# Altium PCB 400503.PcbDoc (part 1 of 3)
Units mm, origin at the board's own origin, x right, y up, seen from the top; angles counter-clockwise.
Board outline 200 x 200 mm, 4 copper layers (Top Layer, Mid-Layer 1, Mid-Layer 2, Bottom Layer), stack 1.58 mm thick; 173 components, 73 nets, 535 pads, 1026 vias.
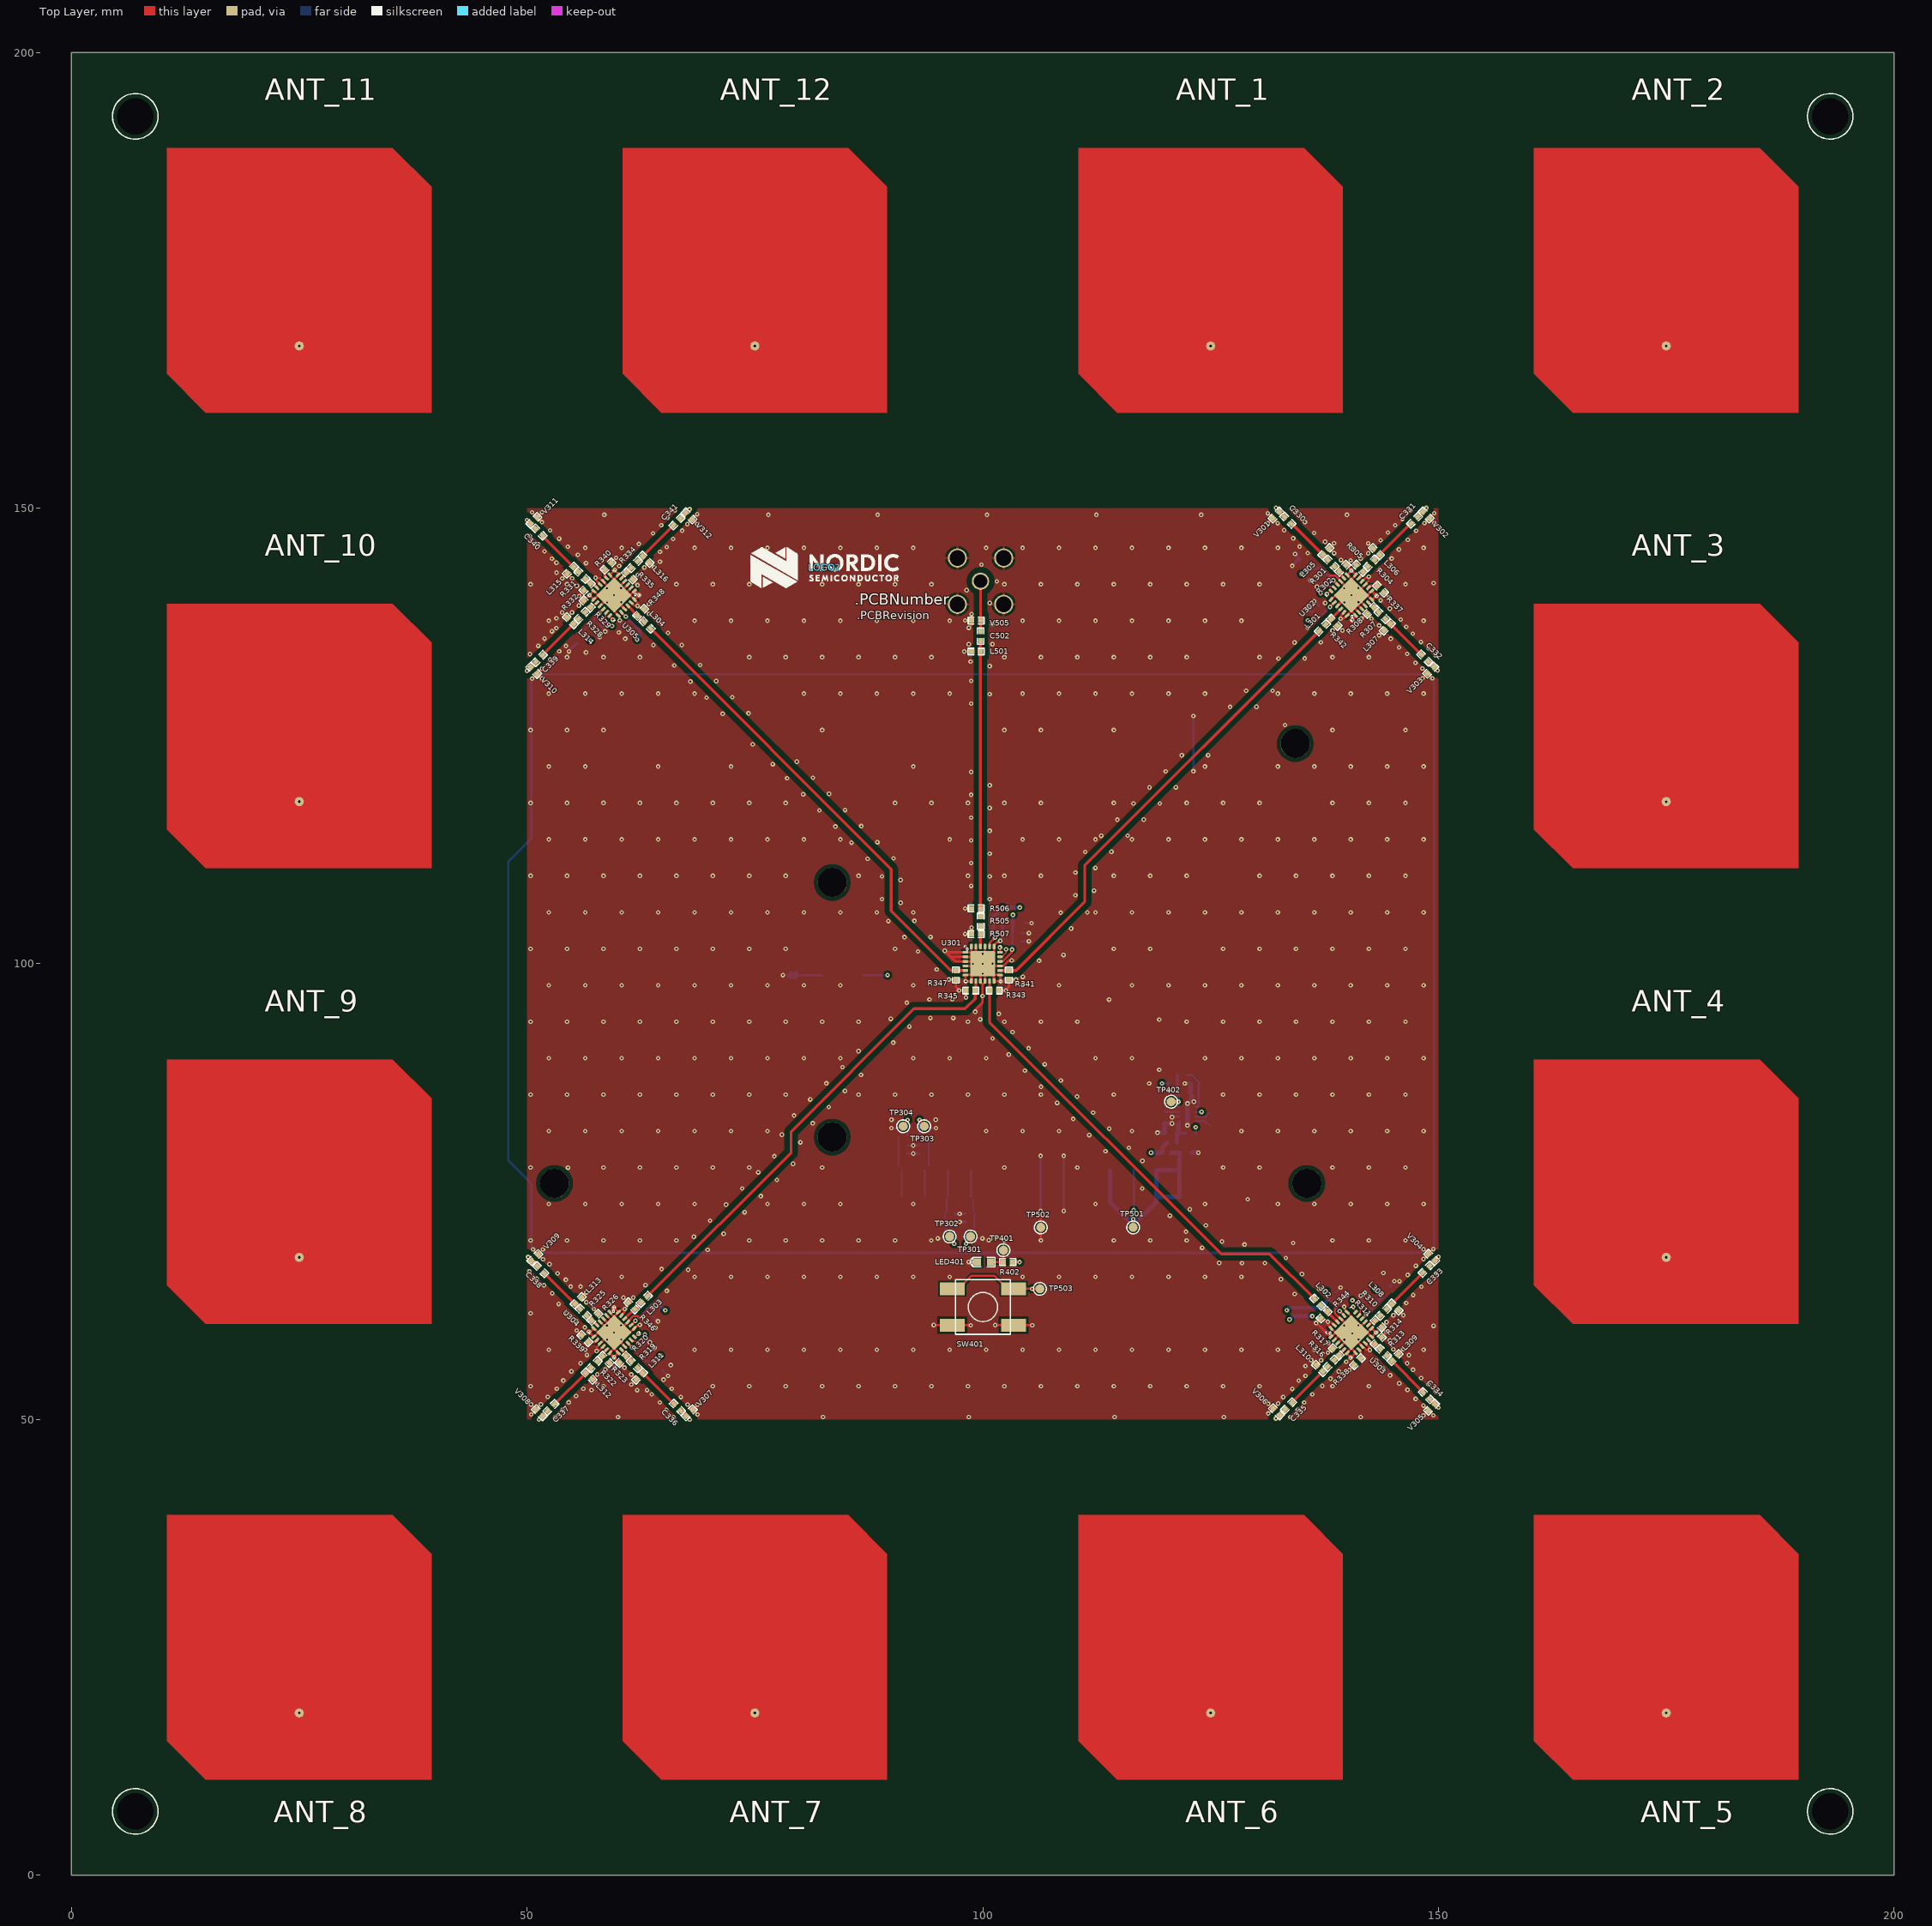
[diagram p0: Top Layer view]
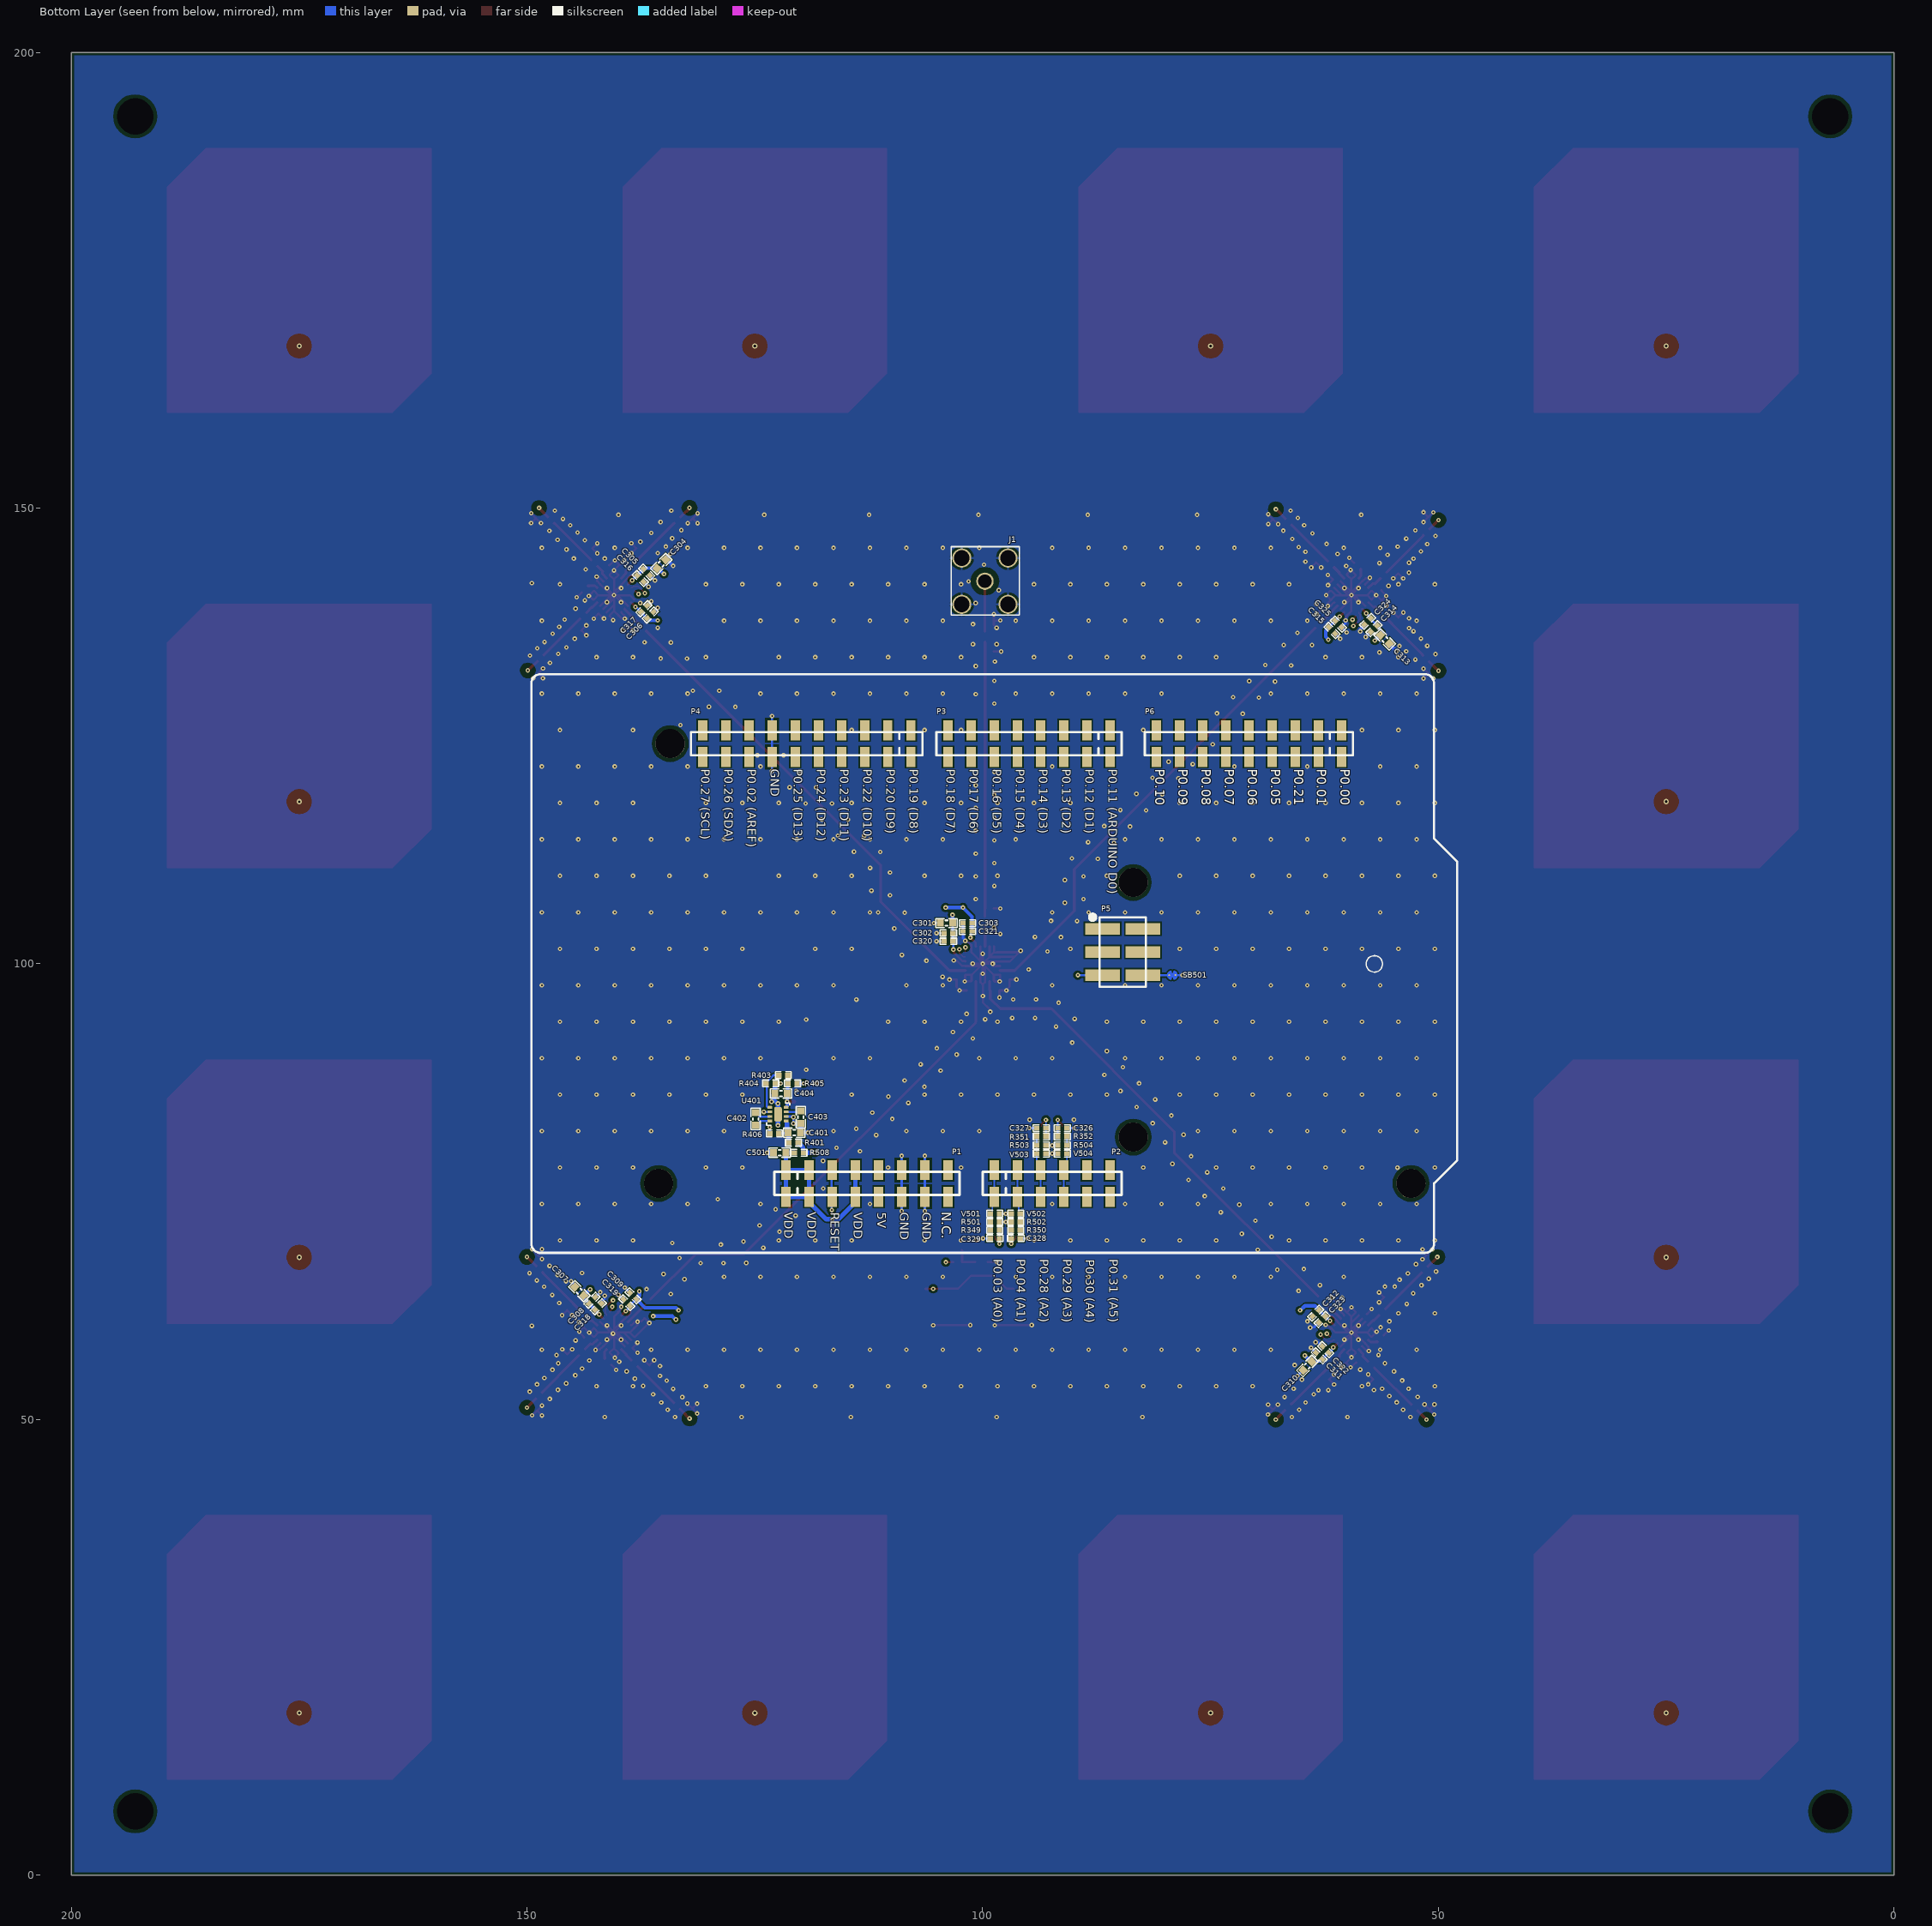
[diagram p1: Bottom Layer view, seen from below]
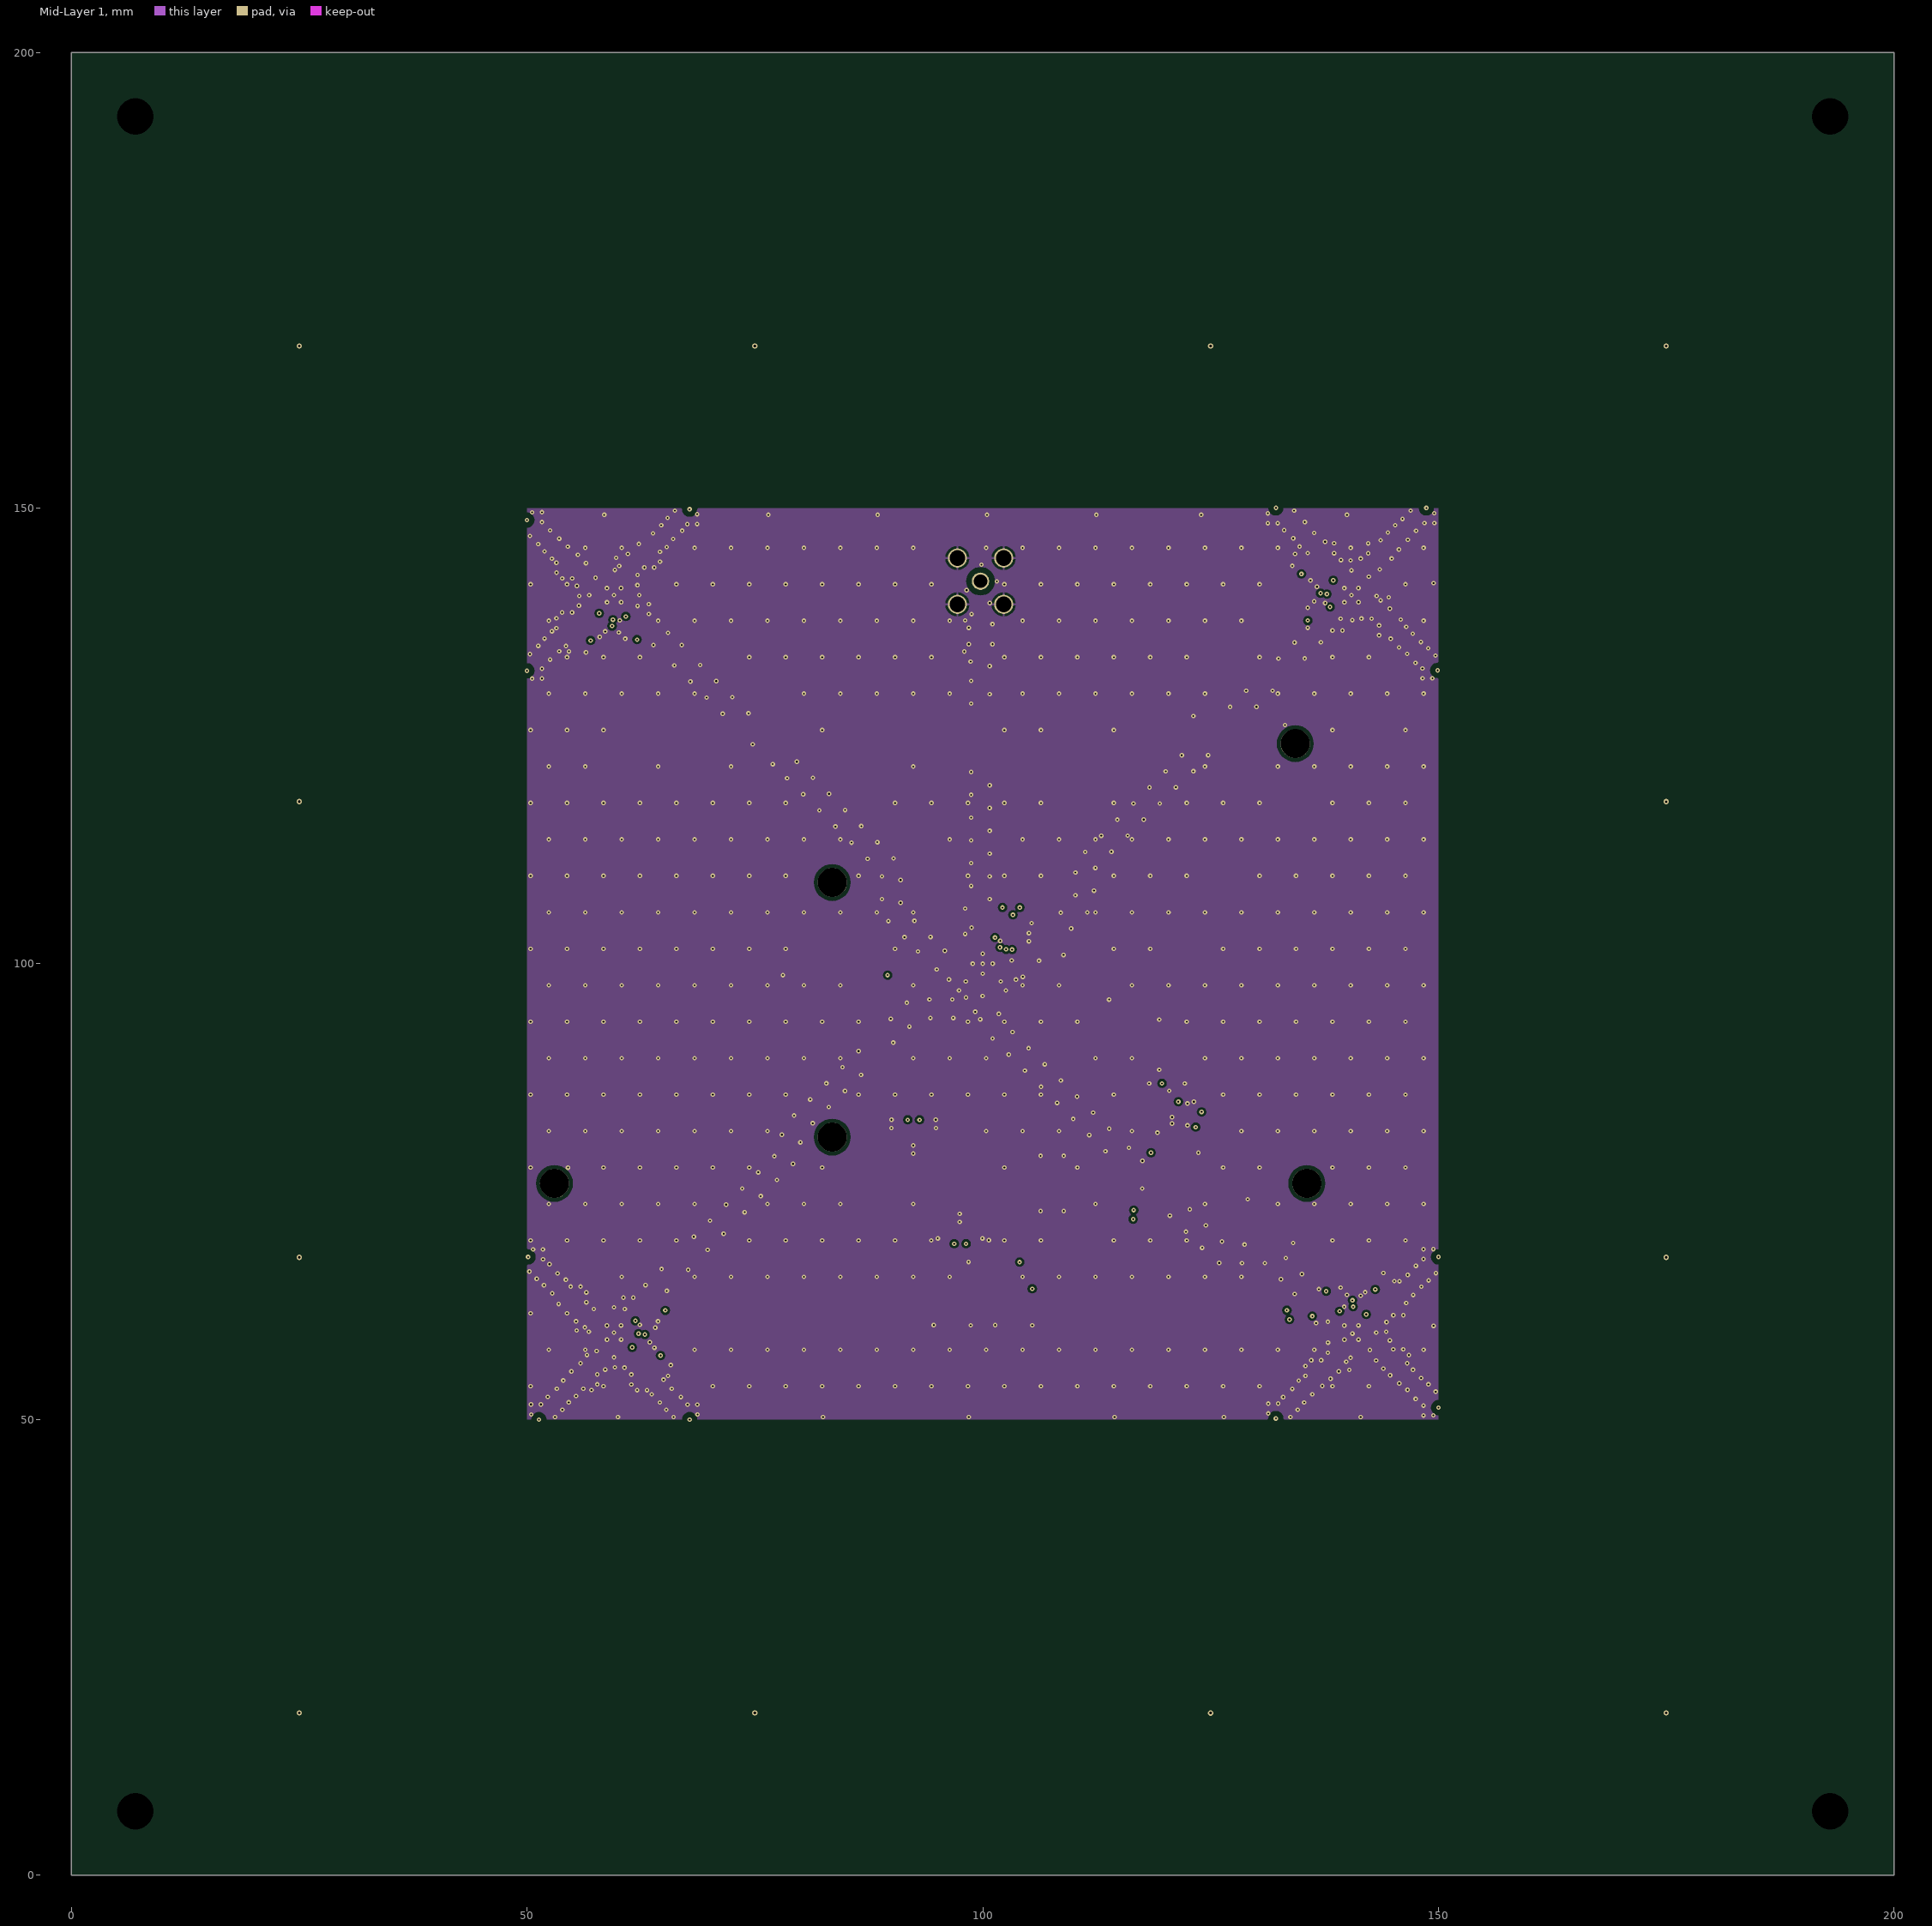
[diagram p2: Mid-Layer 1]
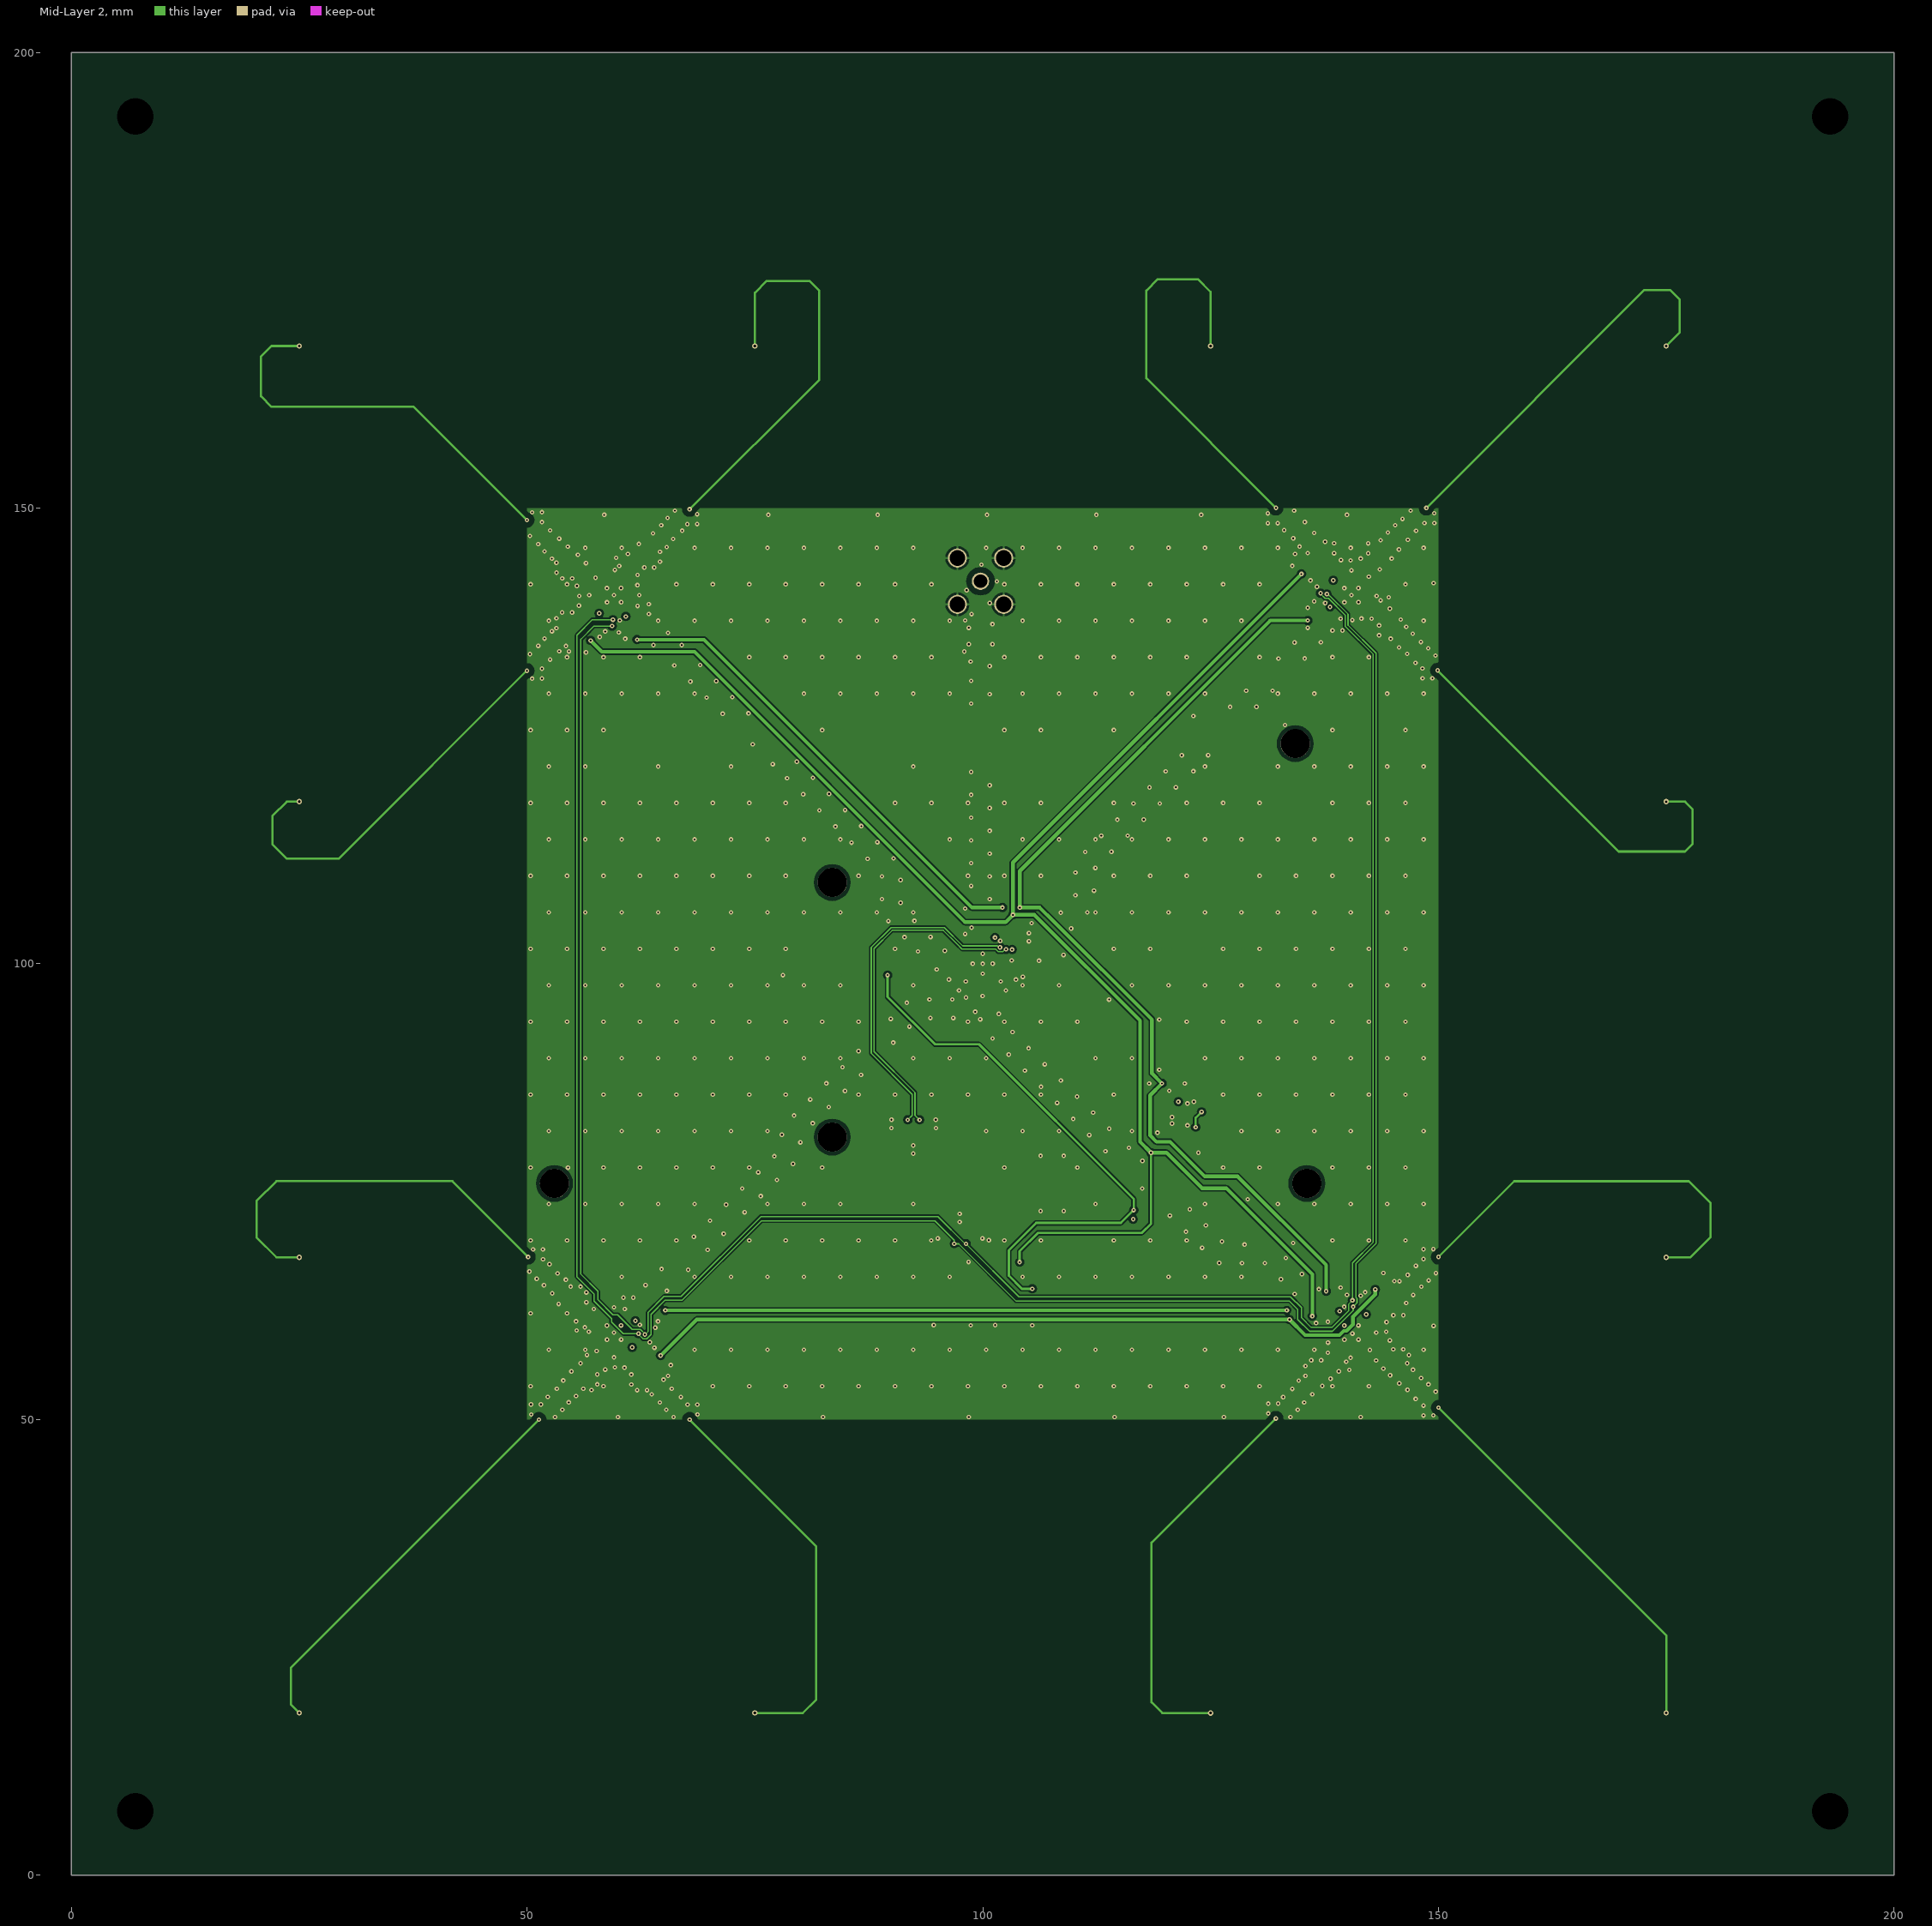
[diagram p3: Mid-Layer 2]
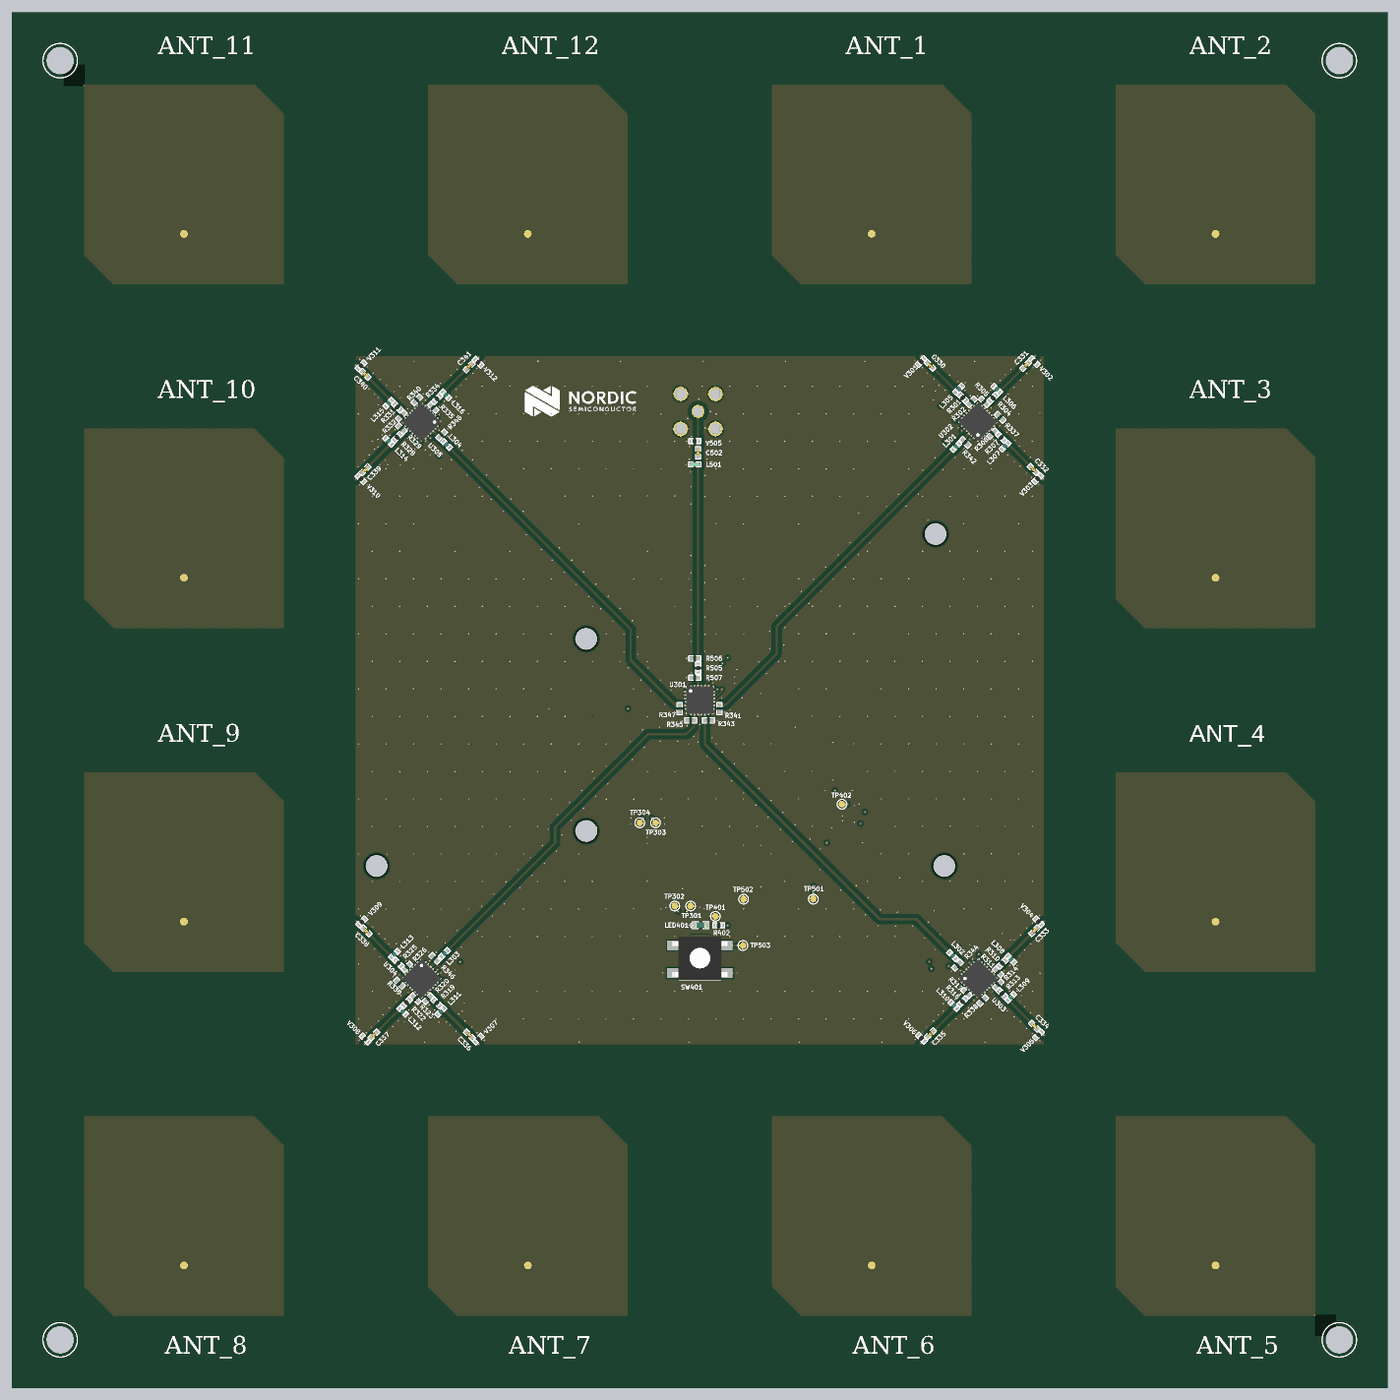
[diagram p6: 3D render of the assembled board from above, using the file's embedded part models]
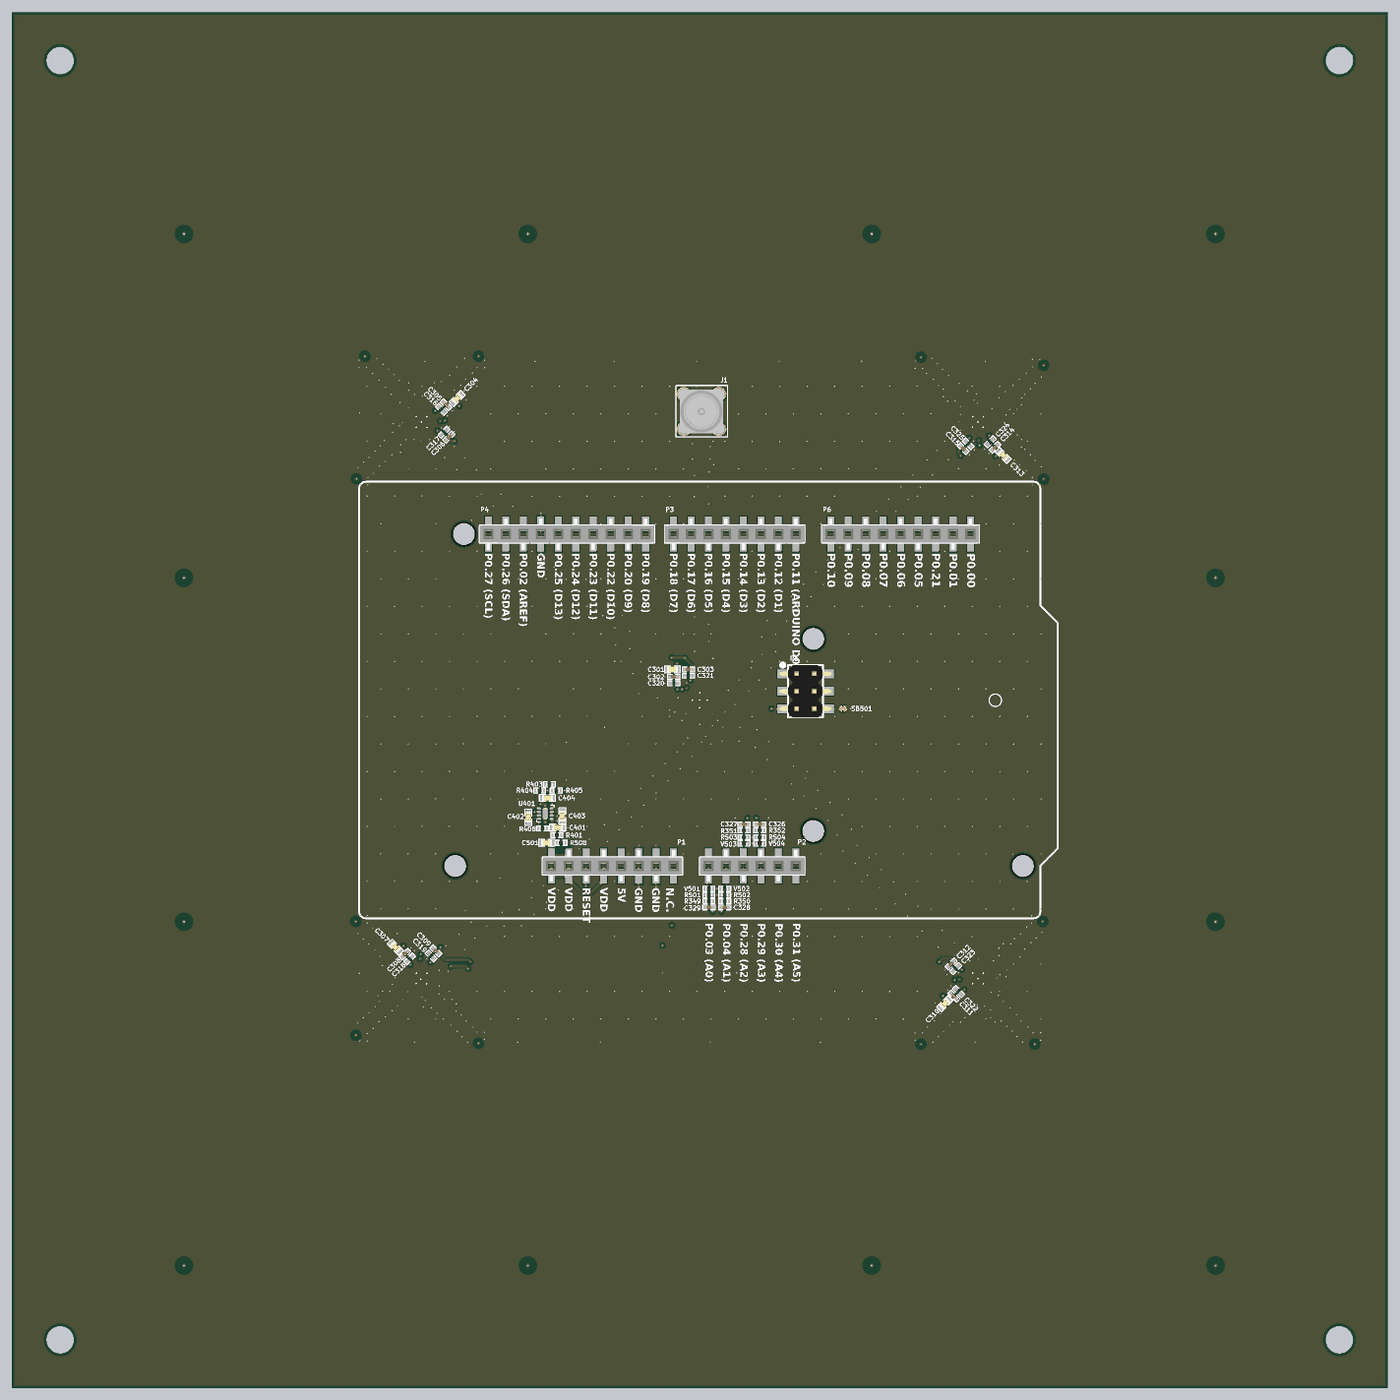
[diagram p7: 3D render of the assembled board from below, using the file's embedded part models]

## Layer stack, top to bottom
Top Solder: solder mask 0.02, Solder Resist, Dk 3.5
Top Layer: signal copper 0.035
Dielectric1: prepreg 0.18, FR-4, Dk 4.1
Mid-Layer 1: signal copper 0.035
Dielectric2: core 1.08, FR-4, Dk 4.3
Mid-Layer 2: signal copper 0.035
Dielectric3: prepreg 0.18, FR-4, Dk 4.1
Bottom Layer: signal copper 0.035
Bottom Solder: solder mask 0.02, Solder Resist, Dk 3.5

## Board outline
0,0 0,200 200,200 200,0

## Design rules (kind name [scope] priority, off if disabled: settings)
BoardOutlineClearance [All] p1: gap=0.3 ignorepadtopadclearanceinfootprint=FALSE
Clearance USB_Poly_Clearance [(InNamedPolygon('Top_Layer-GND')) vs (OnLayer('Mechanical 3'))] p1: gap=0.254 ignorepadtopadclearanceinfootprint=FALSE except(0: Arc-Hole Track-Hole SMDPad-Hole THPad-Hole Via-Hole Fill-Hole Poly-Hole Region-Hole Text-Hole)
Clearance USB_Clearance [(InDifferentialPairClass('All Differential Pairs'))] p2: gap=0.152 ignorepadtopadclearanceinfootprint=FALSE except(0: Arc-Hole Track-Hole SMDPad-Hole THPad-Hole Via-Hole Fill-Hole Poly-Hole Region-Hole Text-Hole)
Clearance ANT_Clerance [InNetClass('ANT_50ohm')] p3: gap=0.15 ignorepadtopadclearanceinfootprint=FALSE except(0.6: Track-Poly SMDPad-Poly THPad-Poly Via-Poly)
Clearance Polygon_Clearance [(InNamedPolygon('Top_Layer-GND')) or (InNamedPolygon('Bottom_Layer-GND')) or (InNamedPolygon('Mid_Layer_1-GND')) or (InNamedPolygon('Mid_Layer_2-VDD'))] p4: gap=0.25 ignorepadtopadclearanceinfootprint=FALSE
Clearance SB_Clearance [HasFootprint('Solderbridge') or HasFootprint('QFN40P180X140X55-10N')] p5: gap=0.127 ignorepadtopadclearanceinfootprint=FALSE except(0: Arc-Hole Track-Hole SMDPad-Hole THPad-Hole Via-Hole Fill-Hole Poly-Hole Region-Hole Text-Hole)
Clearance CSP_Clearance [HasFootprint('BGA4C40P2X2_76X76X62')] p6: gap=0.127 ignorepadtopadclearanceinfootprint=FALSE except(0: Arc-Hole Track-Hole SMDPad-Hole THPad-Hole Via-Hole Fill-Hole Poly-Hole Region-Hole Text-Hole)
Clearance P23_Clearance [HasFootprint('FPC_05P-0.5mm-RA-SMD')] p7: gap=0.127 ignorepadtopadclearanceinfootprint=FALSE except(0: Arc-Hole Track-Hole SMDPad-Hole THPad-Hole Via-Hole Fill-Hole Poly-Hole Region-Hole Text-Hole)
Clearance [All] p8: gap=0.15 ignorepadtopadclearanceinfootprint=FALSE except(0.4: Poly-Hole)
ComponentClearance [All] p1 off: gap=0.2 collisioncheckmode=3 verticalgap=0.2 showdistances=TRUE
DiffPairsRouting [All] p1: maxlimit=0.254 minlimit=0.15 mostfreqgap=0.254 toplayer_maxgap=0.15 toplayer_prefgap=0.15 toplayer_minwidth=0.203 toplayer_maxwidth=0.381 toplayer_prefwidth=0.381 midlayer1_mingap=0.254 midlayer1_minwidth=0.203 midlayer1_maxwidth=0.381 midlayer1_prefwidth=0.381 midlayer2_mingap=0.254 midlayer2_minwidth=0.203 midlayer2_maxwidth=0.381 midlayer2_prefwidth=0.381 bottomlayer_maxgap=0.15 bottomlayer_prefgap=0.15 bottomlayer_minwidth=0.203 bottomlayer_maxwidth=0.381 bottomlayer_prefwidth=0.381 maxuncoupledlength=12.7
FabricationTestPointUsage TestPointUsage [All] p1: valid=0 allowmultiple=FALSE
FabricationTestpoint Testpoint [All] p1: side=3 testpointundercomponent=TRUE minsize=1.016 maxsize=2.54 preferedsize=1.524 minholesize=0 maxholesize=1.016 preferedholesize=0.813 testpointgrid=0.025 allowsidetop=TRUE allowsidebottom=TRUE usegrid=TRUE gridtolerance=0
Height [All] p1 off: minheight=0 maxheight=25.4 prefheight=12.7
HoleSize [All] p1: absolutevalues=TRUE maxlimit=5 minlimit=0.2 maxpercent=80.000 minpercent=20.000
MinimumAnnularRing [All] p1 off: minimumring=0.152
PolygonConnect PolygonConnect_1 [isVia and innet(gnd) or isVia and innet('VDD') or HasFootprint('COAXIAL-SWF') or isVia and innet('VDD_SAM')] p1: connectstyle=Direct reliefconductorwidth=0.254 reliefentries=4 polygonreliefangle="90 Angle" airgapwidth=0.254
PolygonConnect [All] p2: thpad.connectstyle=Relief thpad.reliefconductorwidth=0.25 thpad.reliefentries=4 thpad.polygonreliefangle="90 Angle" thpad.airgapwidth=0.25 smdpad.connectstyle=NoConnect smdpad.reliefconductorwidth=0.254 smdpad.reliefentries=4 smdpad.polygonreliefangle="90 Angle" smdpad.airgapwidth=0.25 via.connectstyle=Direct via.reliefconductorwidth=0.254 via.reliefentries=4 via.polygonreliefangle="90 Angle" via.airgapwidth=0.254
RoomDefinition pca20054_sheet1_cover [InComponentClass('pca20054_sheet1_cover')] p1 off: confinementstyle=ConfineIn formatcopy=TRUE lockcomponents=FALSE outline -97.618,-106.345 -46.818,-106.345 -46.818,-80.945 -97.618,-80.945
RoomDefinition pca20054_sheet4_power_control [InComponentClass('pca20054_sheet4_power_control')] p2 off: confinementstyle=ConfineIn formatcopy=TRUE lockcomponents=FALSE outline -97.618,-106.345 -46.818,-106.345 -46.818,-80.945 -97.618,-80.945
RoomDefinition pca20054_sheet3_antenna_switches [InComponentClass('pca20054_sheet3_antenna_switches')] p3 off: confinementstyle=ConfineIn formatcopy=TRUE lockcomponents=FALSE outline -97.618,-106.345 -46.818,-106.345 -46.818,-80.945 -97.618,-80.945
RoomDefinition pca20054_sheet5_connectors [InComponentClass('pca20054_sheet5_connectors')] p4 off: confinementstyle=ConfineIn formatcopy=TRUE lockcomponents=FALSE outline -26.43,201.178 238.97,201.178 238.97,-19.422 -26.43,-19.422
RoutingVias [All] p1: holewidth=0.2 width=0.5 viastyle="Through Hole" minholewidth=0.2 minwidth=0.5 maxholewidth=0.2 maxwidth=0.5
SilkToSolderMaskClearance SilkscreenOverComponentPads [IsPad] p1: minsilkscreentomaskgap=0.254 clearancetoexposedcopper=TRUE
SolderMaskExpansion [All] p1: expansion=0.05 istentingtop=FALSE
Width Antenna [InNetClass('ANT_50ohm')] p1: maxlimit=3 minlimit=0.1 preferedwidth=0.315 midlayer1_prefwidth=0.24 midlayer2_prefwidth=0.24 minimp=50.000000 maximp=50.000000 favimp=50.000000
Width Pow [InNetClass('Pow_GND')] p2: maxlimit=3 minlimit=0.1 preferedwidth=0.25
Width Standard [All] p3: maxlimit=3 minlimit=0.1 preferedwidth=0.15
23 further rules are at their usual default settings.

## Classes and differential pairs
component class pca20054_sheet1_cover: LOGO?
net class Pow_GND: 3V3RF 3V3RFN GND
net class ANT_50ohm: ANT ANT_1_3 ANT_4_6 ANT_7_9 ANT_10_12 NetANT_1_1 NetANT_2_1 NetANT_3_1 NetANT_4_1 NetANT_5_1 NetANT_6_1 NetANT_7_1 NetANT_8_1 NetANT_9_1 NetANT_10_1 NetANT_11_1 NetANT_12_1 NetC330_1 NetC331_1 NetC332_1 NetC333_1 NetC334_1 NetC335_1 NetC336_1 NetC337_1 NetC338_1 NetC339_1 NetC340_1 NetC341_1 NetC502_1 NetC502_2 NetL301_2 NetL302_2 NetL303_2 NetL304_2 NetR301_1 NetR304_1 NetR307_1 NetR310_1 NetR313_1 NetR316_1 NetR319_1 NetR322_1 NetR325_1 NetR328_1 NetR331_1 NetR334_1
component class pca20054_sheet5_connectors: C501 C502 J1 L501 P1 P2 P3 P4 P5 P6 R501 R502 R503 R504 R505 R506 R507 R508 SB501 TP501 TP502 TP503 V501 V502 V503 V504 V505
component class pca20054_sheet4_power_control: C401 C402 C403 C404 LED401 R401 R402 R403 R404 R405 R406 SW401 TP401 TP402 U401
component class pca20054_sheet3_antenna_switches: ANT_1 ANT_2 ANT_3 ANT_4 ANT_5 ANT_6 ANT_7 ANT_8 ANT_9 ANT_10 ANT_11 ANT_12 C301 C302 C303 C304 C305 C306 C307 C308 C309 C310 C311 C312 C313 C314 C315 C316 C317 C318 C319 C320 C321 C322 C323 C324 C325 C326 C327 C328 C329 C330 C331 C332 C333 C334 C335 C336 C337 C338 C339 C340 C341 L301 L302 L303 L304 L305 L306 L307 L308 L309 L310 L311 L312 L313 L314 L315 L316 R301 R302 R304 R305 R307 R308 R310 R311 R313 R314 R316 R317 R319 R320 R322 R323 R325 R326 R328 R329 R331 R332 R334 R335 R337 R338 R339 R340 R341 R342 R343 R344 R345 R346 R347 R348 R349 R350 R351 R352 TP301 TP302 TP303 TP304 U301 U302 U303 U304 U305 V301 V302 V303 V304 V305 V306 V307 V308 V309 V310 V311 V312

## Components (designator, comment, footprint, x,y, rotation, side; value= is the part's Value field where it differs from the comment)
ANT_1 "Ø1.0mm,SMD" TP_SMD_Ø1.0mm 125,167.8 r0 top
ANT_2 "Ø1.0mm,SMD" TP_SMD_Ø1.0mm 175,167.8 r90 top
ANT_3 "Ø1.0mm,SMD" TP_SMD_Ø1.0mm 175,117.8 r90 top
ANT_4 "Ø1.0mm,SMD" TP_SMD_Ø1.0mm 175,67.799 r180 top
ANT_5 "Ø1.0mm,SMD" TP_SMD_Ø1.0mm 175,17.8 r90 top
ANT_6 "Ø1.0mm,SMD" TP_SMD_Ø1.0mm 125,17.799 r90 top
ANT_7 "Ø1.0mm,SMD" TP_SMD_Ø1.0mm 75,17.8 r90 top
ANT_8 "Ø1.0mm,SMD" TP_SMD_Ø1.0mm 25,17.8 r90 top
ANT_9 "Ø1.0mm,SMD" TP_SMD_Ø1.0mm 25,67.8 r90 top
ANT_10 "Ø1.0mm,SMD" TP_SMD_Ø1.0mm 25,117.8 r90 top
ANT_11 "Ø1.0mm,SMD" TP_SMD_Ø1.0mm 25,167.8 r90 top
ANT_12 "Ø1.0mm,SMD" TP_SMD_Ø1.0mm 75,167.8 r90 top
C301 "1.0µF" CAPC1608X06L 103.97,104.478 r180 bottom
C302 "100pF" CAPC1005X04L 103.77,103.378 r180 bottom
C303 "100pF" CAPC1005X04L 101.67,104.478 r180 bottom
C304 "1.0µF" CAPC1608X06L 135.27,143.878 r315 bottom
C305 "100pF" CAPC1005X04L 136.87,142.978 r45 bottom
C306 "100pF" CAPC1005X04L 136.47,138.278 r315 bottom
C307 "1.0µF" CAPC1608X06L 144.27,64.078 r225 bottom
C308 "100pF" CAPC1005X04L 142.87,63.078 r315 bottom
C309 "100pF" CAPC1005X04L 138.37,63.578 r225 bottom
C310 "1.0µF" CAPC1608X06L 64.37,55.878 r135 bottom
C311 "100pF" CAPC1005X04L 63.07,56.978 r225 bottom
C312 "100pF" CAPC1005X04L 63.47,61.664 r135 bottom
C313 "1.0µF" CAPC1608X06L 55.87,135.595 r45 bottom
C314 "100pF" CAPC1005X04L 57.07,136.778 r135 bottom
C315 "100pF" CAPC1005X04L 61.67,136.578 r45 bottom
C316 "N.C." CAPC1005X04L_NC 137.57,142.278 r45 bottom
C317 "N.C." CAPC1005X04L_NC 137.17,138.978 r315 bottom
C318 "N.C." CAPC1005X04L_NC 142.17,62.378 r315 bottom
C319 "N.C." CAPC1005X04L_NC 139.078,62.83 r225 bottom
C320 "N.C." CAPC1005X04L_NC 103.77,102.478 r180 bottom
C321 "N.C." CAPC1005X04L_NC 101.67,103.578 r180 bottom
C322 "N.C." CAPC1005X04L_NC 62.37,57.678 r225 bottom
C323 "N.C." CAPC1005X04L_NC 62.77,60.978 r135 bottom
C324 "N.C." CAPC1005X04L_NC 57.77,137.578 r135 bottom
C325 "N.C." CAPC1005X04L_NC 60.97,137.278 r45 bottom
C326 "18pF" CAPC1005X04L 91.27,81.978 r0 bottom
C327 "18pF" CAPC1005X04L 93.57,81.978 r180 bottom
C328 "18pF" CAPC1005X04L 96.37,69.878 r0 bottom
C329 "18pF" CAPC1005X04L 98.67,69.878 r180 bottom
C330 "10nF" CAPC1005X04L 133.49,148.685 r135 top
C331 "10nF" CAPC1005X04L 147.381,148.685 r45 top
C332 "10nF" CAPC1005X04L 148.507,133.558 r315 top
C333 "10nF" CAPC1005X04L 148.66,66.493 r45 top
C334 "10nF" CAPC1005X04L 148.685,52.619 r315 top
C335 "10nF" CAPC1005X04L 133.558,51.493 r225 top
C336 "10nF" CAPC1005X04L 66.493,51.34 r315 top
C337 "10nF" CAPC1005X04L 52.619,51.315 r225 top
C338 "10nF" CAPC1005X04L 51.493,66.442 r135 top
C339 "10nF" CAPC1005X04L 51.34,133.507 r225 top
C340 "10nF" CAPC1005X04L 51.315,147.381 r135 top
C341 "10nF" CAPC1005X04L 66.442,148.507 r45 top
C401 "4.7µF" CAPC1608X06L 120.67,81.478 r0 bottom
C402 "1.0µF" CAPC1608X06L 124.92,82.978 r270 bottom
C403 "4.7µF" CAPC1608X06L 119.97,83.178 r90 bottom
C404 "2.2µF" CAPC1608X06L 122.14,85.778 r180 bottom
C501 "1.0µF" CAPC1608X06L 122.27,79.278 r180 bottom
C502 "10nF" CAPC1005X04L 99.77,135.978 r90 top
J1 "SMA Vertical" CON_SMA_COAX_FEM_STRAIGHT_5P_1 99.76,141.99 r180 bottom
L301 "0.5nH" INDC1005X04L 137.27,136.878 r45 top
L302 "0.5nH" INDC1005X04L 136.77,62.878 r315 top
L303 "0.5nH" INDC1005X04L 62.87,63.178 r225 top
L304 "0.5nH" INDC1005X04L 63.17,137.178 r135 top
L305 "2.4nH" INDC1005X04L 137.663,145.25 r225 top
L306 "2.4nH" INDC1005X04L 143.194,145.243 r315 top
L307 "2.4nH" INDC1005X04L 144.394,136.946 r45 top
L308 "2.4nH" INDC1005X04L 145.25,62.337 r135 top
L309 "2.4nH" INDC1005X04L 145.243,56.806 r225 top
L310 "2.4nH" INDC1005X04L 136.946,55.606 r315 top
L311 "2.4nH" INDC1005X04L 62.337,54.75 r45 top
L312 "2.4nH" INDC1005X04L 56.806,54.757 r135 top
L313 "2.4nH" INDC1005X04L 55.606,63.054 r225 top
L314 "2.4nH" INDC1005X04L 54.75,137.663 r315 top
L315 "2.4nH" INDC1005X04L 54.757,143.194 r45 top
L316 "2.4nH" INDC1005X04L 63.054,144.394 r135 top
L501 "30nH" INDC1005X04L_WW 99.27,134.278 r0 top
LED401 "L0603G" LED_0603_G 100.151,67.286 r0 top
LOGO? "Nordic Logo" NORDIC_LOGO_LYING 82.67,143.478 r0 top
P1 "Socket 1x8" SOCKET_1x8_SMD 121.59,75.905 r180 bottom locked
P2 "Socket 1x6" SOCKET_1x6_SMD 98.73,75.905 r180 bottom locked
P3 "Socket 1x8" SOCKET_1x8_SMD 86.03,124.165 r0 bottom locked
P4 "Socket 1x10" SOCKET_1x10_SMD 107.874,124.165 r0 bottom locked
P5 "Pin Hdr 2x3" HDR_2x3-SMD 84.633,101.305 r270 bottom locked
P6 "Socket 1x9" SOCKET_1x9_SMD 60.63,124.165 r0 bottom locked
R301 "0R" RESC1005X04L#1 138.229,143.978 r135 top
R302 "N.C." RESC1005X04L_NC 139.501,143.412 r225 top
R304 "0R" RESC1005X04L#1 142.629,143.971 r45 top
R305 "N.C." RESC1005X04L_NC 141.356,143.405 r315 top
R307 "0R" RESC1005X04L#1 143.829,138.219 r315 top
R308 "N.C." RESC1005X04L_NC 142.563,138.777 r45 top
R310 "0R" RESC1005X04L#1 143.978,61.771 r45 top locked
R311 "N.C." RESC1005X04L_NC 143.412,60.499 r135 top locked
R313 "0R" RESC1005X04L#1 143.971,57.371 r315 top locked
R314 "N.C." RESC1005X04L_NC 143.405,58.644 r225 top locked
R316 "0R" RESC1005X04L#1 138.219,56.171 r225 top locked
R317 "N.C." RESC1005X04L_NC 138.777,57.437 r315 top locked
R319 "0R" RESC1005X04L#1 61.771,56.022 r315 top locked
R320 "N.C." RESC1005X04L_NC 60.499,56.588 r45 top locked
R322 "0R" RESC1005X04L#1 57.371,56.029 r225 top locked
R323 "N.C." RESC1005X04L_NC 58.644,56.595 r135 top locked
R325 "0R" RESC1005X04L#1 56.171,61.781 r135 top locked
R326 "N.C." RESC1005X04L_NC 57.437,61.223 r225 top locked
R328 "0R" RESC1005X04L#1 56.022,138.229 r225 top locked
R329 "N.C." RESC1005X04L_NC 56.588,139.501 r315 top locked
R331 "0R" RESC1005X04L#1 56.029,142.629 r135 top locked
R332 "N.C." RESC1005X04L_NC 56.595,141.356 r45 top locked
R334 "0R" RESC1005X04L#1 61.781,143.829 r45 top locked
R335 "N.C." RESC1005X04L_NC 61.223,142.563 r135 top locked
R337 "N.C." RESC1005X04L_NC 143.654,141.12 r315 top
R338 "N.C." RESC1005X04L_NC 141.12,56.346 r225 top locked
R339 "N.C." RESC1005X04L_NC 56.346,58.88 r135 top locked
R340 "N.C." RESC1005X04L_NC 58.88,143.654 r45 top locked
R341 "N.C." RESC1005X04L_NC 102.87,98.778 r90 top
R342 "N.C." RESC1005X04L_NC 138.57,137.478 r135 top
R343 "N.C." RESC1005X04L_NC 101.27,97.078 r180 top
R344 "N.C." RESC1005X04L_NC 137.47,61.478 r45 top
R345 "N.C." RESC1005X04L_NC 98.67,97.078 r0 top
R346 "N.C." RESC1005X04L_NC 61.47,62.478 r315 top
R347 "N.C." RESC1005X04L_NC 97.07,98.778 r90 top
R348 "N.C." RESC1005X04L_NC 62.47,138.578 r225 top
R349 "100R" RESC1005X04L#1 98.67,70.778 r180 bottom
R350 "100R" RESC1005X04L#1 96.37,70.778 r0 bottom
R351 "100R" RESC1005X04L#1 93.57,81.078 r180 bottom
R352 "100R" RESC1005X04L#1 91.27,81.078 r0 bottom
R401 "0R" RESC1005X04L#1 120.77,80.378 r0 bottom
R402 "220R" RESC1005X04L#1 102.751,67.263 r0 top
R403 "86k6" RESC1005X04L#1 121.87,87.778 r180 bottom
R404 "51k1" RESC1005X04L#1 123.27,86.878 r0 bottom
R405 "0R" RESC1005X04L#1 120.87,86.878 r180 bottom
R406 "10k" RESC1005X04L#1 122.87,81.378 r0 bottom
R501 "1M0" RESC1005X04L#1 98.67,71.678 r0 bottom
R502 "1M0" RESC1005X04L#1 96.37,71.678 r180 bottom
R503 "1M0" RESC1005X04L#1 93.57,80.078 r0 bottom
R504 "1M0" RESC1005X04L#1 91.27,80.078 r180 bottom
R505 "0R" RESC1005X04L#1 99.77,104.678 r270 top
R506 "N.C." RESC1005X04L_NC 99.27,106.078 r0 top
R507 "N.C." RESC1005X04L_NC 99.27,103.278 r0 top
R508 "0R" RESC1005X04L#1 120.17,79.278 r180 bottom
SB501 "Solderbridge" Solderbridge_Shorted_Power 79.188,98.762 r180 bottom net-tie
SW401 "PB SW" Switch-PB-6.2x6.3mm-SMD 100.024,62.349 r0 top
TP301 "Ø1.0mm,SMD" TP_SMD_Ø1.0mm 98.67,70.078 r180 top
TP302 "Ø1.0mm,SMD" TP_SMD_Ø1.0mm 96.37,70.078 r180 top
TP303 "Ø1.0mm,SMD" TP_SMD_Ø1.0mm 93.57,82.178 r180 top
TP304 "Ø1.0mm,SMD" TP_SMD_Ø1.0mm 91.27,82.178 r180 top
TP401 "Ø1.0mm,SMD" TP_SMD_Ø1.0mm 102.27,68.578 r90 top
TP402 "Ø1.0mm,SMD" TP_SMD_Ø1.0mm 120.67,84.878 r90 top
TP501 "Ø1.0mm,SMD" TP_SMD_Ø1.0mm 116.51,71.078 r90 top
TP502 "Ø1.0mm,SMD" TP_SMD_Ø1.0mm 106.37,71.078 r90 top
TP503 "Ø1.0mm,SMD" TP_SMD_Ø1.0mm 106.27,64.343 r90 top
U301 "PE42442" QFN50P400X400X80_HS-25N 100,100.018 r0 top
U302 "PE42442" QFN50P400X400X80_HS-25N 140.454,140.454 r135 top
U303 "PE42442" QFN50P400X400X80_HS-25N 140.454,59.546 r45 top locked
U304 "PE42442" QFN50P400X400X80_HS-25N 59.546,59.546 r315 top locked
U305 "PE42442" QFN50P400X400X80_HS-25N 59.546,140.454 r225 top locked
U401 "LM27761" SON50P200X80_HS-9L 122.46,83.508 r0 bottom
V301 "LXES15AAA1-133" RESC1005X04L#2 132.183,149.246 r225 top
V302 "LXES15AAA1-133" RESC1005X04L#2 148.657,149.256 r315 top
V303 "LXES15AAA1-133" RESC1005X04L#2 149.15,132.226 r225 top
V304 "LXES15AAA1-133" RESC1005X04L#2 149.263,67.799 r135 top
V305 "LXES15AAA1-133" RESC1005X04L#2 149.256,51.343 r225 top
V306 "LXES15AAA1-133" RESC1005X04L#2 132.226,50.85 r135 top
V307 "LXES15AAA1-133" RESC1005X04L#2 67.8,50.737 r45 top
V308 "LXES15AAA1-133" RESC1005X04L#2 51.343,50.744 r135 top
V309 "LXES15AAA1-133" RESC1005X04L#2 50.85,67.774 r45 top
V310 "LXES15AAA1-133" RESC1005X04L#2 50.737,132.2 r315 top
V311 "LXES15AAA1-133" RESC1005X04L#2 50.744,148.657 r45 top
V312 "LXES15AAA1-133" RESC1005X04L#2 67.774,149.15 r315 top
V501 "LXES15AAA1-133" RESC1005X04L#2 98.67,72.578 r180 bottom
V502 "LXES15AAA1-133" RESC1005X04L#2 96.37,72.578 r0 bottom
V503 "LXES15AAA1-133" RESC1005X04L#2 93.57,79.178 r180 bottom
V504 "LXES15AAA1-133" RESC1005X04L#2 91.27,79.178 r0 bottom
V505 "LXES15AAA1-133" RESC1005X04L#2 99.27,137.678 r180 top

## Footprints (in the part's own frame and the unit in brackets; to place one, negate y for a bottom-side part, rotate by r counter-clockwise, add the part's x,y. Pads: shape width x height; smd on the part's side, far side on the other; paste and mask are expansions set on the pad)
CAPC1005X04L [mm]
  rect 0.6x0.5 smd: 1(-0.5,0) 2(0.5,0)
  silkscreen extent -0.9,-0.35 0.9,0.35, body extent -0.51,-0.25 0.51,0.25, height 0.5
CAPC1005X04L_NC [mm] "Chip Capacitor, 2-Leads, Body 1.0x0.5mm, IPC High Density"
  rect 0.6x0.5 smd: 1(-0.5,0) 2(0.5,0)
  silkscreen extent -0.9,-0.35 0.9,0.35
CAPC1608X06L [mm]
  rect 0.75x0.8 smd: 1(-0.675,0) 2(0.675,0)
  silkscreen extent -1.17,-0.5 1.17,0.5, body extent -0.8,-0.43 0.8,0.43, height 0.8
CON_SMA_COAX_FEM_STRAIGHT_5P_1 [mm]
  round 1.9 hole 1.5 paste-127 mask+0.05: 1(0,0)
  round 2.1 hole 1.7 paste-127 mask+0.05: 2(-2.54,-2.54) 3(2.54,-2.54) 4(2.54,2.54) 5(-2.54,2.54)
  body extent -3.22,-3.16 3.15,3.22, height 9.43
HDR_2x3-SMD [mil]
  rect 50x150 smd: 1(-100,-87.5) 2(-100,87.5) 3(0,-87.5) 4(0,87.5) 5(100,-87.5) 6(100,87.5)
  silkscreen extent -160,-140 150,100, body extent -150,-148 150,148, height 382
INDC1005X04L [mm]
  rect 0.65x0.5 smd: 1(-0.475,0) 2(0.475,0)
  silkscreen extent -0.9,-0.35 0.9,0.35, body extent -0.5,-0.3 0.5,0.3, height 0.5
INDC1005X04L_WW [mm] "Chip Inductor, 2-Leads, Body 1.0x0.5mm, IPC High Density"
  rect 0.65x0.5 smd: 1(-0.475,0) 2(0.475,0)
  silkscreen extent -0.9,-0.35 0.9,0.35, body extent -0.5,-0.3 0.5,0.3, height 0.51
LED_0603_G [mil]
  rect 30x32 smd: 1(-27.5,0) 2(27.5,0)
  silkscreen extent -58,-20 48,20, body extent -32,-16 32,16, height 24
NORDIC_LOGO_LYING [mm]
  silkscreen extent -8.13,-2.24 8.13,2.24
QFN50P400X400X80_HS-25N [mm] "PQFN, 24-Leads, Body 4.00x4.00mm, Pitch 0.50mm, Thermal Pad 2.75x2.75mm, IPC Medium Density"
  rrect50% 0.6x0.3 smd: 1(-1.9,1.25) 2(-1.9,0.75) 3(-1.9,0.25) 4(-1.9,-0.25) 5(-1.9,-0.75) 6(-1.9,-1.25) 13(1.9,-1.25) 14(1.9,-0.75) 15(1.9,-0.25) 16(1.9,0.25) 17(1.9,0.75) 18(1.9,1.25)
  rrect50% 0.3x0.6 smd: 7(-1.25,-1.9) 8(-0.75,-1.9) 9(-0.25,-1.9) 10(0.25,-1.9) 11(0.75,-1.9) 12(1.25,-1.9) 19(1.25,1.9) 20(0.75,1.9) 21(0.25,1.9) 22(-0.25,1.9) 23(-0.75,1.9) 24(-1.25,1.9)
  rrect10% 2.75x2.75 smd paste-5: 25(0,0)
  silkscreen extent -2,-2 2,2, body extent -2,-2 2,2, height 0.8
RESC1005X04L#1 [mm]
  rect 0.6x0.55 smd: 1(-0.5,0) 2(0.5,0)
  silkscreen extent -0.88,-0.38 0.88,0.38, body extent -0.5,-0.25 0.5,0.25, height 0.3
RESC1005X04L#2 [mm] "Chip Resistor, 2-Leads, Body 1.0x0.5mm, IPC High Density"
  rect 0.6x0.55 smd mask+0.05: 1(-0.5,0) 2(0.5,0)
  silkscreen extent -0.88,-0.38 0.88,0.38, body extent -0.5,-0.25 0.5,0.25, height 0.3
RESC1005X04L_NC [mm] "Chip Resistor, 2-Leads, Body 1.0x0.5mm, IPC High Density"
  rect 0.6x0.55 smd mask+0.05: 1(-0.5,0) 2(0.5,0)
  silkscreen extent -0.88,-0.38 0.88,0.38
SOCKET_1x6_SMD [mm]
  rect 1.02x2.19 smd: 1(0,-1.465) 1(0,1.465) 2(2.54,-1.465) 2(2.54,1.465) 3(5.08,-1.465) 3(5.08,1.465) 4(7.62,-1.465) 4(7.62,1.465) 5(10.16,-1.465) 5(10.16,1.465) 6(12.7,1.465) 6(12.7,-1.465)
  silkscreen extent -1.27,-1.27 13.97,1.27, body extent -1.27,-2.29 13.97,2.29, height 7.47
SOCKET_1x8_SMD [mm]
  rect 1.02x2.19 smd: 1(0,-1.465) 1(0,1.465) 2(2.54,-1.465) 2(2.54,1.465) 3(5.08,-1.465) 3(5.08,1.465) 4(7.62,-1.465) 4(7.62,1.465) 5(10.16,-1.465) 5(10.16,1.465) 6(12.7,1.465) 6(12.7,-1.465) 7(15.24,-1.465) 7(15.24,1.465) 8(17.78,-1.465) 8(17.78,1.465)
  silkscreen extent -1.27,-1.27 19.05,1.27, body extent -1.27,-2.29 19.05,2.29, height 7.47
SOCKET_1x9_SMD [mm]
  rect 1.02x2.19 smd: 1(0,-1.465) 1(0,1.465) 2(2.54,-1.465) 2(2.54,1.465) 3(5.08,-1.465) 3(5.08,1.465) 4(7.62,-1.465) 4(7.62,1.465) 5(10.16,-1.465) 5(10.16,1.465) 6(12.7,1.465) 6(12.7,-1.465) 7(15.24,-1.465) 7(15.24,1.465) 8(17.78,-1.465) 8(17.78,1.465) 9(20.32,-1.465) 9(20.32,1.465)
  silkscreen extent -1.27,-1.27 21.59,1.27, body extent -1.26,-2.3 21.6,2.28, height 7.47
SOCKET_1x10_SMD [mm]
  rect 1.02x2.19 smd: 1(0,-1.465) 1(0,1.465) 2(2.54,-1.465) 2(2.54,1.465) 3(5.08,-1.465) 3(5.08,1.465) 4(7.62,-1.465) 4(7.62,1.465) 5(10.16,-1.465) 5(10.16,1.465) 6(12.7,-1.465) 6(12.7,1.465) 7(15.24,-1.465) 7(15.24,1.465) 8(17.78,-1.465) 8(17.78,1.465) 9(20.32,-1.465) 9(20.32,1.465) 10(22.86,-1.465) 10(22.86,1.465)
  silkscreen extent -1.27,-1.27 24.13,1.27, body extent -1.27,-2.29 24.13,2.29, height 7.47
Solderbridge_Shorted_Power [mm]
  round 0.2 smd paste-10: 1(-0.338,0) 2(0.338,0)
  Top Layer region: 0.102,0.432 0.178,0.505 0.296,0.467 0.361,0.424 0.434,0.351 0.488,0.292 0.546,0.193 0.574,0.099 0.569,-0.122 0.544,-0.193 0.46,-0.33 0.376,-0.411 0.284,-0.469 0.183,-0.5 0.132,-0.483 0.102,-0.43
  Top Layer region: -0.102,-0.432 -0.178,-0.505 -0.296,-0.467 -0.361,-0.424 -0.434,-0.351 -0.488,-0.292 -0.546,-0.193 -0.574,-0.099 -0.569,0.122 -0.544,0.193 -0.46,0.33 -0.376,0.411 -0.284,0.469 -0.183,0.5 -0.132,0.483 -0.102,0.43
  Top Layer lines w0.152: 0.178,-0.431 ccw(c0.068,0) 0.178,0.431 ; -0.178,-0.431 cw(c-0.068,0) -0.178,0.431
  Top Layer lines w0.508: 0.338,0 -0.338,0
SON50P200X80_HS-9L [mm] "SON, 8-Leads, Body 2.00x2.00mm, Pitch 0.50mm, Thermal Pad 1.60x0.69mm, IPC High Density"
  rrect50% 0.55x0.3 smd: 1(-0.895,0.75) 2(-0.895,0.25) 3(-0.895,-0.25) 4(-0.895,-0.75) 5(0.895,-0.75) 6(0.895,-0.25) 7(0.895,0.25) 8(0.895,0.75)
  rrect50% 0.85x1.6 smd paste-0.05: 9(0,0)
  body extent -1.7,-1.05 1.05,1.05, height 1
Switch-PB-6.2x6.3mm-SMD [mm]
  rect 2.75x1.4 smd: 1(-3.375,2) 1(3.375,2) 2(-3.375,-2) 2(3.375,-2)
  silkscreen extent -3,-3 3,3, body extent -4,-3 4,3.3, height 3.1
TP_SMD_Ø1.0mm [mm]
  round 1 smd paste-5: 1(0,0)

## Part data
ANT_1 ANT_2 ANT_3 ANT_4 ANT_5 ANT_6 ANT_7 ANT_8 ANT_9 ANT_10 ANT_11 ANT_12 TP301 TP302 TP303 TP304 TP401 TP402 TP501 TP502 TP503: library part TP_SMD_Ø1.0MM, "1.0mm circular SMD testpad", Manufacturer="Nordic Semiconductor", Part number IPS=N.A., Artikkelnr Noca=N.A., ComponentLink1Description=Datasheet, ComponentLink2Description="Supplier link", Footprint Doc=TP_SMD_Ø1.0mm, LatestRevisionDate=2013-06-11, Part Number=TP_SMD_Ø1.0MM, Pin Count=1, Published=2013-06-11, Publisher="Nordic Semiconductor"
C301 C304 C307 C310 C313 C402 C501: library part C0603-1µ0, "Capacitor, X7R, ±10%", Part number IPS=00000000616, Artikkelnr Noca=20039282, ComponentLink1Description=Datasheet, ComponentLink2Description="Supplier link", Footprint Doc=0603, LatestRevisionDate=2013-06-05, Note=16V, Part Number=C0603-1µ0, Pin Count=2, Published=2009-05-08, Publisher="Nordic Semiconductor"
C302 C303 C305 C306 C308 C309 C311 C312 C314 C315: library part C0402-100p, "Capacitor, NP0, ±5%", Part number IPS=00000002361, Artikkelnr Noca=20029135, ComponentLink1Description=Datasheet, ComponentLink2Description="Supplier link", Footprint Doc=0402, LatestRevisionDate=2009-05-08, Note=50V, Part Number=C0402-100p, Pin Count=2, Published=2009-05-08, Publisher="Nordic Semiconductor"
C316 C317 C318 C319 C320 C321 C322 C323 C324 C325: library part C0402-N.C., "Not mounted", Part number IPS=N.A., Artikkelnr Noca=N.A., Assembly="Not mounted", ComponentLink1Description=Datasheet, ComponentLink2Description="Supplier link", Footprint Doc=0402, LatestRevisionDate=2009-05-08, Note="Chip Cap", Part Number=C0402-N.C., Pin Count=2, Published=2009-05-08, Publisher="Nordic Semiconductor"
C326 C327 C328 C329: library part C0402-18p, "Capacitor, NP0, ±5%", Part number IPS=N.A., Artikkelnr Noca=20029209, ComponentLink1Description=Datasheet, ComponentLink2Description="Supplier link", Footprint Doc=0402, LatestRevisionDate=2009-05-08, Note=50V, Part Number=C0402-18p, Pin Count=2, Published=2009-05-08, Publisher="Nordic Semiconductor"
C330 C331 C332 C333 C334 C335 C336 C337 C338 C339 C340 C341 C502: library part C0402-10n, "Capacitor, X7R, ±10%", Part number IPS=00000007784, Artikkelnr Noca=20039166, ComponentLink1Description=Datasheet, ComponentLink2Description="Supplier link", Footprint Doc=0402, LatestRevisionDate=2009-11-23, Note=16V, Part Number=C0402-10n, Pin Count=2, Published=2009-05-08, Publisher="Nordic Semiconductor"
C401 C403: library part C0603-4µ7, "Capacitor, X5R, ±10%", Part number IPS=00000007783, Artikkelnr Noca=20069060, ComponentLink1Description=Datasheet, ComponentLink2Description="Supplier link", Footprint Doc=0603, LatestRevisionDate=2009-11-23, Note=6.3V, Part Number=C0603-4µ7, Pin Count=2, Published=2009-05-08, Publisher="Nordic Semiconductor"
C404: library part C0603-2µ2, "Capacitor, X7R, ±10%", Part number IPS=N.A., Artikkelnr Noca=20039322, ComponentLink1Description=Datasheet, ComponentLink2Description="Supplier link", Footprint Doc=0603, LatestRevisionDate=2016-10-10, Note=6.3V, Part Number=C0603-2µ2, Pin Count=2, Published=2009-05-08, Publisher="Nordic Semiconductor"
J1: library part SMA-Vert-Std_Sigma, "SMA Vertical connector", Part number IPS=N.A., Artikkelnr Noca=N.A., ComponentLink1Description=Datasheet, ComponentLink2Description="Supplier link", Footprint Doc=SMA-VERT, LatestRevisionDate=2009-12-12, Note="SMA vertical", Part Number=SMA-Vert-Std_Sigma, Pin Count=5, Published=2009-12-12, Publisher="Nordic Semiconductor"
L301 L302 L303 L304: library part L0402-0n5, "Inductor, 1A, ±0.1nH", Manufacturer="TDK Corporation", Manufacturer Part Number=MLG1005S0N5BT000, Part number IPS=N.A., Supplier Part Number 1=445-16235-1-ND, Artikkelnr Noca=N.A., ComponentLink1Description=Datasheet, ComponentLink2Description="Supplier link", ComponentLink2URL=https://product.tdk.com/info/en/catalog/datasheets/inductor_commercial_high-frequency_mlg1005s_en.pdf?ref_disty=digikey, Footprint Doc=0402, LatestRevisionDate=2012-09-19, Note="High frequency chip inductor ±0.1nH", Part Number=L0402-0n5, Pin Count=2, Published=2009-05-08, Publisher="Nordic Semiconductor", Supplier 1=Digi-Key
L305 L306 L307 L308 L309 L310 L311 L312 L313 L314 L315 L316: library part L0402-2n4, "Inductor, 220mA, ±0.1nH", Part number IPS=N.A., ComponentLink1Description=Datasheet, ComponentLink2Description="Supplier link", Footprint Doc=0402, LatestRevisionDate=2012-09-19, Note="High frequency chip inductor ±5%", Part Number=L0402-2n4, Pin Count=2, Published=2009-05-08, Publisher="Nordic Semiconductor"
L501: library part L0402-30n-Wirewound-Murata, "Inductor, 270mA, ±2%, 580mO, Q=25", Manufacturer=Murata, Manufacturer Part Number=LQW15AN30NG00, Part number IPS=N.A., Supplier Part Number 1=490-6802-1-ND, Artikkelnr Noca=N.A., ComponentLink1Description=Datasheet, ComponentLink1URL=https://search.murata.co.jp/Ceramy/image/img/P02/JELF243A-0050.pdf, ComponentLink2Description="Supplier link", Footprint Doc=0402, HelpURL=https://psearch.en.murata.com/inductor/product/LQW15AN30NG00%23.html, LatestRevisionDate=2019-04-16, Note="-55°C ~ 125°C", Part Number=L0402-30n-Wirewound-Murata, Pin Count=2, Published=2019-04-16, Publisher="Nordic Semiconductor", Supplier 1=Digi-Key
LED401: library part "LG L29K Smartled Green", "LED, Green, 0603, 570nm, Vf=1.7V, 2.24..5.6mcd, - 40 to +100°C", Manufacturer=Osram, Manufacturer Part Number="LG L29K-G2J1-24-Z", Part number IPS=00000009961, Supplier Part Number 1=475-2709-1-ND, Artikkelnr Noca=13019147, ComponentLink1Description=Datasheet, ComponentLink2Description="Supplier link", Footprint Doc=0603, HelpURL=http://www.osram-os.com/Graphics/XPic2/00077107_0.pdf, LatestRevisionDate=2017-08-21, Note="2.24..5.6 mcd, Vfmin=1.7V", Part Number="LG L29K Smartled Green", Pin Count=2, Published=2014-10-28, Publisher="Nordic Semiconductor", Supplier 1=Digi-Key, Supplier 2=Mouser, Supplier Part Number 2=720-LGL29KG2J124Z
LOGO?: library part "Nordic Logo lying", "Nordic logo lying", Part number IPS=N.A., Artikkelnr Noca=N.A., ComponentLink1Description=Datasheet, ComponentLink2Description="Supplier link", Footprint Doc="Nordic Logo", LatestRevisionDate=2017-03-20, Part Number="Nordic Logo lying", Pin Count=0, Published=2017-09-01, Publisher="Nordic Semiconductor"
P1 P3: library part "Socket 1x8 SMD", "Socket 1x8, 2.54mm (100mil), SMD", Manufacturer=W-CON, Manufacturer Part Number=2171-108MS0CUNR1, Part number IPS=00000009963, Artikkelnr Noca=55030002, ComponentLink1Description=Datasheet, ComponentLink2Description="Supplier link", Footprint Doc=SOCKET_1x8_SMD, LatestRevisionDate=2017-10-23, Part Number="Socket 1x8 SMD", Pin Count=8, Published=2016-01-22, Publisher="Nordic Semiconductor", Supplier 1=Cabcon, Supplier 2=Samtec, Supplier Part Number 1=2171-108MS0CUNR1, Supplier Part Number 2=SSM-108-F-SV-P-TR
P2: library part "Socket 1x6 SMD", "Socket 1x6, 2.54mm (100mil), SMD", Manufacturer=W-CON, Manufacturer Part Number=2171-106MS0CUNR1, Part number IPS=00000009964, Artikkelnr Noca=55030001, ComponentLink1Description=Datasheet, ComponentLink2Description="Supplier link", Footprint Doc=SOCKET_1x6_SMD, LatestRevisionDate=2017-10-23, Part Number="Socket 1x6 SMD", Pin Count=6, Published=2016-01-22, Publisher="Nordic Semiconductor", Supplier 1=Cabcon, Supplier 2=Samtec, Supplier Part Number 1=2171-106MS0CUNR1, Supplier Part Number 2=SSM-106-F-SV-P-TR
P4: library part "Socket 1x10 SMD", "Socket 1x10, 2.54mm (100mil), SMD", Manufacturer=W-CON, Manufacturer Part Number=2171-110MS0CUNR1, Part number IPS=00000009965, Artikkelnr Noca=55030004, ComponentLink1Description=Datasheet, ComponentLink2Description="Supplier link", Footprint Doc=SOCKET_1x10_SMD, LatestRevisionDate=2016-01-22, Part Number="Socket 1x10 SMD", Pin Count=10, Published=2016-01-22, Publisher="Nordic Semiconductor", Supplier 1=Cabcon, Supplier 2=Samtec, Supplier Part Number 1=2171-110MS0CUNR1, Supplier Part Number 2=SSM-110-F-SV-P-TR
P5: library part "Pin Header 2x3 SMD", "Pin Header 2x3, 2.54mm (100mil) SMD", Manufacturer=W-CON, Manufacturer Part Number=1125-1203S0M116R1, Part number IPS=00000009966, Artikkelnr Noca=55010007, ComponentLink1Description=Datasheet, ComponentLink2Description="Supplier link", Footprint Doc=HDR_2x3-SMD, HelpURL=\\hizz\pro\app9717\Datasheet\connectors\W-CON\1125-12XXXXMXXXXX.PDF, LatestRevisionDate=2016-01-22, Note=SMD, Part Number="Pin Header 2x3 SMD", Pin Count=6, Published=2016-01-22, Publisher="Nordic Semiconductor", Supplier 1=Cabcon, Supplier 2=Samtec, Supplier Part Number 1=1125-1203S0M116R1, Supplier Part Number 2=TSM-103-01-L-DV
P6: library part "Socket 1x9 SMD", "Socket 1x9, 2.54mm (100mil), SMD", Manufacturer=W-CON, Manufacturer Part Number=2171-109MS0CUNR1, Part number IPS=N.A., Artikkelnr Noca=55030003, ComponentLink1Description=Datasheet, ComponentLink2Description="Supplier link", Footprint Doc=SOCKET_1x9_SMD, LatestRevisionDate=2017-10-23, Part Number="Socket 1x9 SMD", Pin Count=9, Published=2016-01-22, Publisher="Nordic Semiconductor", Supplier 1=Cabcon, Supplier 2=Samtec, Supplier Part Number 1=2171-109MS0CUNR1, Supplier Part Number 2=SSM-109-L-SV-P-TR
R301 R304 R307 R310 R313 R316 R319 R322 R325 R328 R331 R334 R401 R405 R505 R508: library part R0402-0R, "Resistor, ±5%, 0.063W", Part number IPS=00000007128, Supplier Part Number 1=146-9661, Artikkelnr Noca=27049000, ComponentLink1Description=Datasheet, ComponentLink2Description="Supplier link", Footprint Doc=0402, LatestRevisionDate=2009-11-23, Note="Chip Res 5%", Part Number=R0402-0R, Pin Count=2, Published=2009-05-08, Publisher="Nordic Semiconductor", Supplier 1=Farnell
R302 R305 R308 R311 R314 R317 R320 R323 R326 R329 R332 R335 R337 R338 R339 R340 R341 R342 R343 R344 R345 R346 R347 R348 R506 R507: library part R0402-N.C., "Not mounted", Part number IPS=N.A., Artikkelnr Noca=N.A., Assembly="Not mounted", ComponentLink1Description=Datasheet, ComponentLink2Description="Supplier link", Footprint Doc=0402, LatestRevisionDate=2009-05-08, Note="Chip Res", Part Number=R0402-N.C., Pin Count=2, Published=2009-05-08, Publisher="Nordic Semiconductor"
R349 R350 R351 R352: library part R0402-100, "Resistor, ±1%, 0.063W", Part number IPS=00000002811, Supplier Part Number 1=173-8837, Artikkelnr Noca=27049049, ComponentLink1Description=Datasheet, ComponentLink2Description="Supplier link", Footprint Doc=0402, LatestRevisionDate=2009-11-23, Note="Chip Res 1%", Part Number=R0402-100, Pin Count=2, Published=2009-05-08, Publisher="Nordic Semiconductor", Supplier 1=Farnell
R402: library part R0402-220, "Resistor, ±1%, 0.063W", Part number IPS=N.A., Supplier Part Number 1=173-8841, Artikkelnr Noca=27049057, ComponentLink1Description=Datasheet, ComponentLink2Description="Supplier link", Footprint Doc=0402, LatestRevisionDate=2009-11-23, Note="Chip Res 1%", Part Number=R0402-220, Pin Count=2, Published=2009-05-08, Publisher="Nordic Semiconductor", Supplier 1=Farnell
R403: library part R0402-86k6, "Resistor, ±1%, 0.063W", Manufacturer=Panasonic, Manufacturer Part Number=ERJ-2RKF8662X, Part number IPS=N.A., Supplier Part Number 1=P86.6KLCT-ND, Artikkelnr Noca=27049119, ComponentLink1Description=Datasheet, ComponentLink2Description="Supplier link", Footprint Doc=0402, LatestRevisionDate=2009-11-23, Note="Chip Res 1%", Part Number=R0402-86k6, Pin Count=2, Published=2009-05-08, Publisher="Nordic Semiconductor", Supplier 1=Digi-Key, Supplier 2=Mouser, Supplier Part Number 2=667-ERJ-2RKF8662X
R404: library part R0402-51k1, "Resistor, ±0.1%, 0.063W", Manufacturer=Panasonic, Manufacturer Part Number=ERA-2AEB5112X, Part number IPS=N.A., Supplier Part Number 1=P51.1KDCCT-ND, Artikkelnr Noca=N.A., ComponentLink1Description=Datasheet, ComponentLink2Description="Supplier link", Footprint Doc=0402, LatestRevisionDate=2016-11-24, Note="Chip Res 1%", Part Number=R0402-51k1, Pin Count=2, Published=2016-11-24, Publisher="Nordic Semiconductor", Supplier 1=Digi-Key, Supplier 2=Mouser, Supplier Part Number 2=667-ERA-2AEB5112X
R406: library part R0402-10k, "Resistor, ±1%, 0.063W", Part number IPS=00000002093, Supplier Part Number 1=173-8864, Artikkelnr Noca=27049097, ComponentLink1Description=Datasheet, ComponentLink2Description="Supplier link", Footprint Doc=0402, LatestRevisionDate=2009-11-23, Note="Chip Res 1%", Part Number=R0402-10k, Pin Count=2, Published=2009-05-08, Publisher="Nordic Semiconductor", Supplier 1=Farnell
R501 R502 R503 R504: library part R0402-1M0, "Resistor, ±1%, 0.063W", Part number IPS=00000006807, Artikkelnr Noca=27049145, ComponentLink1Description=Datasheet, ComponentLink2Description="Supplier link", Footprint Doc=0402, LatestRevisionDate=2009-11-23, Note="Chip Res 1%", Part Number=R0402-1M0, Pin Count=2, Published=2009-05-08, Publisher="Nordic Semiconductor"
SB501: library part "Solderbridge Shorted Power", "Shorted Solderbridge Power", Part number IPS=N.A., Artikkelnr Noca=N.A., ComponentLink1Description=Datasheet, ComponentLink2Description="Supplier link", Footprint Doc=Solderbridge_Shorted_Power, LatestRevisionDate=2012-08-07, Part Number="Solderbridge Shorted Power", Pin Count=2, Published=2012-08-07, Publisher="Nordic Semiconductor"
SW401: library part Switch-PB-6.2x6.3mm-SMD, "Tactile Switch, SPNO, SMD, 160gf, 6.2x6.3x2.5mm", Manufacturer=Dailywell, Manufacturer Part Number=TS604VM1-025BR-R, Part number IPS=00000007812, Artikkelnr Noca=50019106, ComponentLink1Description=Datasheet, ComponentLink2Description="Supplier link", Footprint Doc=Switch-PB-6.2x6.3mm-SMD, HelpURL=\\hizz\pro\app9717\Datasheet\switches\Dailywell\TS604VM1-025BR-R.pdf, LatestRevisionDate=2016-04-21, Part Number=Switch-PB-6.2x6.3mm-SMD, Pin Count=4, Published=2010-02-01, Publisher="Nordic Semiconductor", Supplier 1=Cabcon, Supplier 2=Mouser, Supplier Part Number 1=TS604VM1-025BR-R, Supplier Part Number 2=688-SKHUALE010
U301 U302 U303 U304 U305: "UltraCMOS SP4T RF Switch 30 MHz-6 GHz", Manufacturer="Peregrine Semiconductors", Part number IPS=N.A., Supplier Part Number 1=1046-1096-1-ND, Artikkelnr Noca=N.A., ComponentLink1Description=Datasheet, ComponentLink1URL=http://www.psemi.com/pdf/datasheets/pe42442ds.pdf, ComponentLink2Description="Supplier link", ComponentLink2URL=https://www.digikey.com/product-detail/en/psemi/PE42442A-Z/1046-1096-1-ND/4747404, Footprint Doc=QFN-24, HelpURL=https://www.psemi.com/products/rf-switches/pe42442, LatestRevisionDate=2020-01-17, Manufacturer Part Number=PE42442, Part Number=PE42442, Pin Count=5, Published=2020-01-17, Publisher="Nordic Semiconductor", Supplier 1=Digi-Key
U401: "Low-Noise, Regulated, Switched-Capacitor Voltage Inverter", Manufacturer="Texas Instruments", Part number IPS=N.A., Supplier Part Number 1=296-43882-1-ND, Artikkelnr Noca=N.A., ComponentLink1Description=Datasheet, ComponentLink1URL=http://www.ti.com/lit/ds/symlink/lm27761.pdf, ComponentLink2Description="Supplier link", ComponentLink2URL=https://www.digikey.com/product-detail/en/texas-instruments/LM27761DSGT/296-43882-1-ND/5880550, Footprint Doc=WSON-8, HelpURL=https://www.ti.com/product/LM27761, LatestRevisionDate=2020-01-17, Manufacturer Part Number=LM27761, Note="DSGT: 250 pts reel", Part Number=LM27761, Pin Count=8, Published=2020-01-17, Publisher="Nordic Semiconductor", Supplier 1=Digi-Key, Supplier 2=Mouser, Supplier Part Number 2=595-LM27761DSGR
V301 V302 V303 V304 V305 V306 V307 V308 V309 V310 V311 V312 V501 V502 V503 V504 V505: "TVS DIODE 15VWM 0402", Manufacturer=Murata, Part number IPS=N.A., Supplier Part Number 1=490-13209-6-ND, Artikkelnr Noca=N.A., ComponentLink1Description=Datasheet, ComponentLink2Description="Supplier link", Footprint Doc=0402, HelpURL=http://www.murata.com/en-us/products/productdata/8796832759838/CRESD-E.pdf, LatestRevisionDate=2017-09-20, Manufacturer Part Number=LXES15AAA1-133, Part Number=LXES15AAA1-133, Pin Count=2, Published=2017-09-20, Publisher="Nordic Semiconductor", Supplier 1=Digi-Key, Supplier 2=Mouser, Supplier Part Number 2=81-LXES15AAA1-133

## Free pads (board coordinates)
  round 3.2 hole 3.2 unplated mask+0.2: 1(53.01,75.905) 1(83.49,80.985) 1(83.49,108.925) 1(134.29,124.165) 1(135.56,75.905)
  round 0.4 hole 4 unplated mask+0.2: 3(7,7) 3(7,193) 3(193,7) 3(193,193)

## Via types
v1: diameter 0.5, hole 0.2, Top Layer to Bottom Layer, tented both sides, 989 vias
v2: diameter 0.5, hole 0.2, Top Layer to Bottom Layer, 25 vias
v3: diameter 0.6, hole 0.3, Top Layer to Bottom Layer, tented both sides, 12 vias

## Nets (pads, with @x,y where several pads share a name; then routed paths per layer and width w, separated by ;. In a path a pad name is that pad's centre, name@x,y a point inside that pad or via, vN(x,y) a via of type N, cw(c..) or ccw(c..) an arc to the next point about the centre after c; other vN are vias at no path point)
3V3RF: C301.2 C302.2 C304.2 C305.2 C307.2 C308.2 C310.2 C311.2 C313.2 C314.2 C316.2 C318.2 C320.2 C322.2 C324.2 R401.1 R402.2 R508.2 U301.16 U302.16 U303.16 U304.16 U305.16 | length 310.9
  Top Layer w0.25: v1(57.912,138.467) U305.16@58.379,138.934 U305.16@58.381,138.934 ; U304.16@61.066,58.381 U304.16@61.066,58.379 v1(61.533,57.912) ; U301.16@101.9,100.268 101.925,100.293 102.22,100.293 103.179,101.252 103.179,101.514 v1(103.227,101.562) ; R402.2@103.251,67.263 v1(104.048,67.263) ; v1(138.467,142.088) U302.16@138.934,141.621 ; U303.16@141.619,61.066 U303.16@141.621,61.066 v1(142.088,61.533)
  Mid-Layer 2 w0.25: v1(104.048,67.263) 104.048,68.456 106.07,70.478 117.47,70.478 118.47,71.478 v1(118.47,79.278)
  Mid-Layer 2 w0.4: v1(56.97,135.478) 58.193,134.254 68.381,134.254 98.058,104.578 102.52,104.578 v1(103.32,105.378) ; v1(64.655,57.015) 68.618,60.978 69.17,60.978 v1(133.662,60.978) 135.387,59.253 139.145,59.253 139.609,59.717 139.922,59.717 140.625,60.419 140.625,61.272 143.07,63.718 v1(143.07,64.278) ; v1(134.97,142.778) 103.32,111.127 v1(103.32,105.378) ; v1(136.17,61.341) 136.17,65.929 126.721,75.378 124.07,75.378 120.17,79.278 v1(118.47,79.278) 117.27,80.478 117.27,93.778 105.67,105.378 v1(103.32,105.378)
  Bottom Layer w0.25: C313.2@56.347,136.072 56.057,136.362 56.716,137.021 C314.2@56.716,137.131 57.416,137.831 C324.2@57.416,137.931 57.912,138.427 v1(57.912,138.467) ; v1(61.533,57.912) 61.575,57.871 61.575,57.766 C322.2@62.016,57.324 C311.2@62.716,56.624 62.752,56.659 63.074,56.337 63.875,56.337 C310.2@63.893,56.355 ; v1(103.227,101.562) 103.227,102.375 cw(c103.373,102.375) C320.2@103.27,102.478 C302.2@103.27,103.378 ccw(c103.21,103.438) 103.295,103.438 C301.2@103.295,104.478 ; C316.2@137.924,142.631 v1(138.467,142.088) ; v1(142.088,61.533) 142.088,61.561 142.524,61.997 C318.2@142.524,62.024
  Bottom Layer w0.4: C313.2@56.347,136.072 56.376,136.072 v1(56.97,135.478) ; C310.2@63.893,56.355 63.995,56.355 v1(64.655,57.015) ; C301.2@103.295,104.478 ccw(c103.235,104.538) 103.32,104.538 v1(103.32,105.378) ; v1(133.662,60.978) 133.689,60.978 134.052,61.341 v1(136.17,61.341) ; v1(134.97,142.778) 134.997,142.778 135.62,143.4 C304.2@135.747,143.4 135.765,143.418 136.995,143.418 137.117,143.296 137.188,143.296 C305.2@137.224,143.331 C316.2@137.924,142.631 ; C318.2@142.524,62.024 C308.2@143.224,62.724 143.188,62.759 143.793,63.364 C307.2@143.793,63.6 143.77,63.6 143.093,64.278 v1(143.07,64.278)
  Bottom Layer w0.5: v1(118.47,79.278) R508.2@119.67,79.278 119.695,79.278 119.72,79.303 119.72,79.853 120.245,80.378 R401.1@120.27,80.378
3V3RFN: C303.2 C306.2 C309.2 C312.2 C315.2 C317.2 C319.2 C321.2 C323.2 C325.2 R405.2 U301.20 U302.20 U303.20 U304.20 U305.20 | length 257.8
  Top Layer w0.25: U305.20@60.359,138.58 U305.20@60.359,138.58 v1(60.826,138.111) ; U304.20@61.42,60.359 61.422,60.359 v1(61.889,60.826) ; U301.20@100.75,101.918 100.775,101.943 100.775,102.31 v1(101.35,102.885) ; v1(138.111,139.174) 138.578,139.641 U302.20@138.58,139.641 ; v1(139.174,61.889) 139.641,61.422 U303.20@139.641,61.42
  Mid-Layer 2 w0.4: v1(62.07,135.578) 69.419,135.578 98.819,106.178 v1(102.17,106.178) ; v1(65.17,61.978) 133.363,61.978 v1(133.37,61.985) ; v1(135.67,137.678) 131.556,137.678 104.07,110.191 v1(104.07,106.178) 106.263,106.178 107.696,104.744 118.57,93.87 118.57,87.978 v1(119.67,86.878) 118.37,85.578 118.37,81.178 119.07,80.478 120.57,80.478 124.37,76.678 127.97,76.678 137.689,66.959 v1(137.689,64.078)
  Bottom Layer w0.25: v1(60.826,138.111) 60.843,138.111 C325.2@61.324,137.631 C315.2@62.024,136.931 ; v1(61.889,60.826) 62.394,61.331 C323.2@62.416,61.331 62.43,61.331 C312.2@63.116,62.017 ; C321.2@101.17,103.578 101.177,103.578 101.302,103.453 101.302,102.933 v1(101.35,102.885) ; C306.2@136.824,137.924 C317.2@137.524,138.624 138.073,139.174 v1(138.111,139.174) ; C309.2@138.016,63.224 138.724,62.516 C319.2@138.724,62.476 138.724,62.338 v1(139.174,61.889)
  Bottom Layer w0.4: C315.2@61.988,136.896 C315.2@62.024,136.931 62.024,136.924 62.37,136.578 62.37,135.905 62.07,135.605 v1(62.07,135.578) v1@62.055,135.592 ; C312.2@63.116,62.017 63.152,61.982 63.152,62.088 63.541,62.478 64.643,62.478 65.143,61.978 v1(65.17,61.978) ; C321.2@101.17,103.578 C303.2@101.17,104.478 101.17,105.178 v1(102.17,106.178) v1(104.07,106.178) ; v1(119.67,86.878) R405.2@120.37,86.878 ; v1(133.37,61.985) 133.658,62.273 137.065,62.273 C309.2@138.016,63.224 138.016,63.231 137.67,63.578 137.67,64.059 v1(137.689,64.078) v1@137.708,64.059 ; v1(135.67,137.678) 136.506,137.678 136.788,137.959 C306.2@136.824,137.924
ANT: R505.2 R507.2 U301.22 | length 2.3
  Top Layer w0.315: U301.22@99.75,101.918 99.75,103.258 R507.2@99.77,103.278 R505.2@99.77,104.178
ANT_1_3: L301.1 R341.2 U301.14 | length 52.8
  Top Layer w0.315: U301.14@101.9,99.268 102.86,99.268 R341.2@102.87,99.278 103.67,99.278 111.191,106.798 111.191,110.798 L301.1@136.934,136.542
ANT_4_6: L302.1 R343.2 U301.11 | length 52.8
  Top Layer w0.315: U301.11@100.75,98.118 R343.2@100.75,97.098 ; R343.2@100.77,97.078 R343.2@100.75,97.098 ; L302.1@136.434,63.214 131.47,68.178 126.17,68.178 100.75,93.598 R343.2@100.75,97.098
ANT_7_9: L303.1 R345.2 U301.8 | length 52.8
  Top Layer w0.315: L303.1@63.206,63.514 78.97,79.278 78.97,81.578 92.47,95.078 98.07,95.078 99.17,96.178 R345.2@99.17,97.078 99.25,97.158 U301.8@99.25,98.118
ANT_10_12: L304.1 R347.2 U301.5 | length 52.8
  Top Layer w0.315: L304.1@63.506,136.842 89.97,110.378 89.97,105.813 96.506,99.278 R347.2@97.07,99.278 ; R347.2@97.08,99.268 U301.5@98.1,99.268